# Allegro board pc049a_lemo_db_12.brd
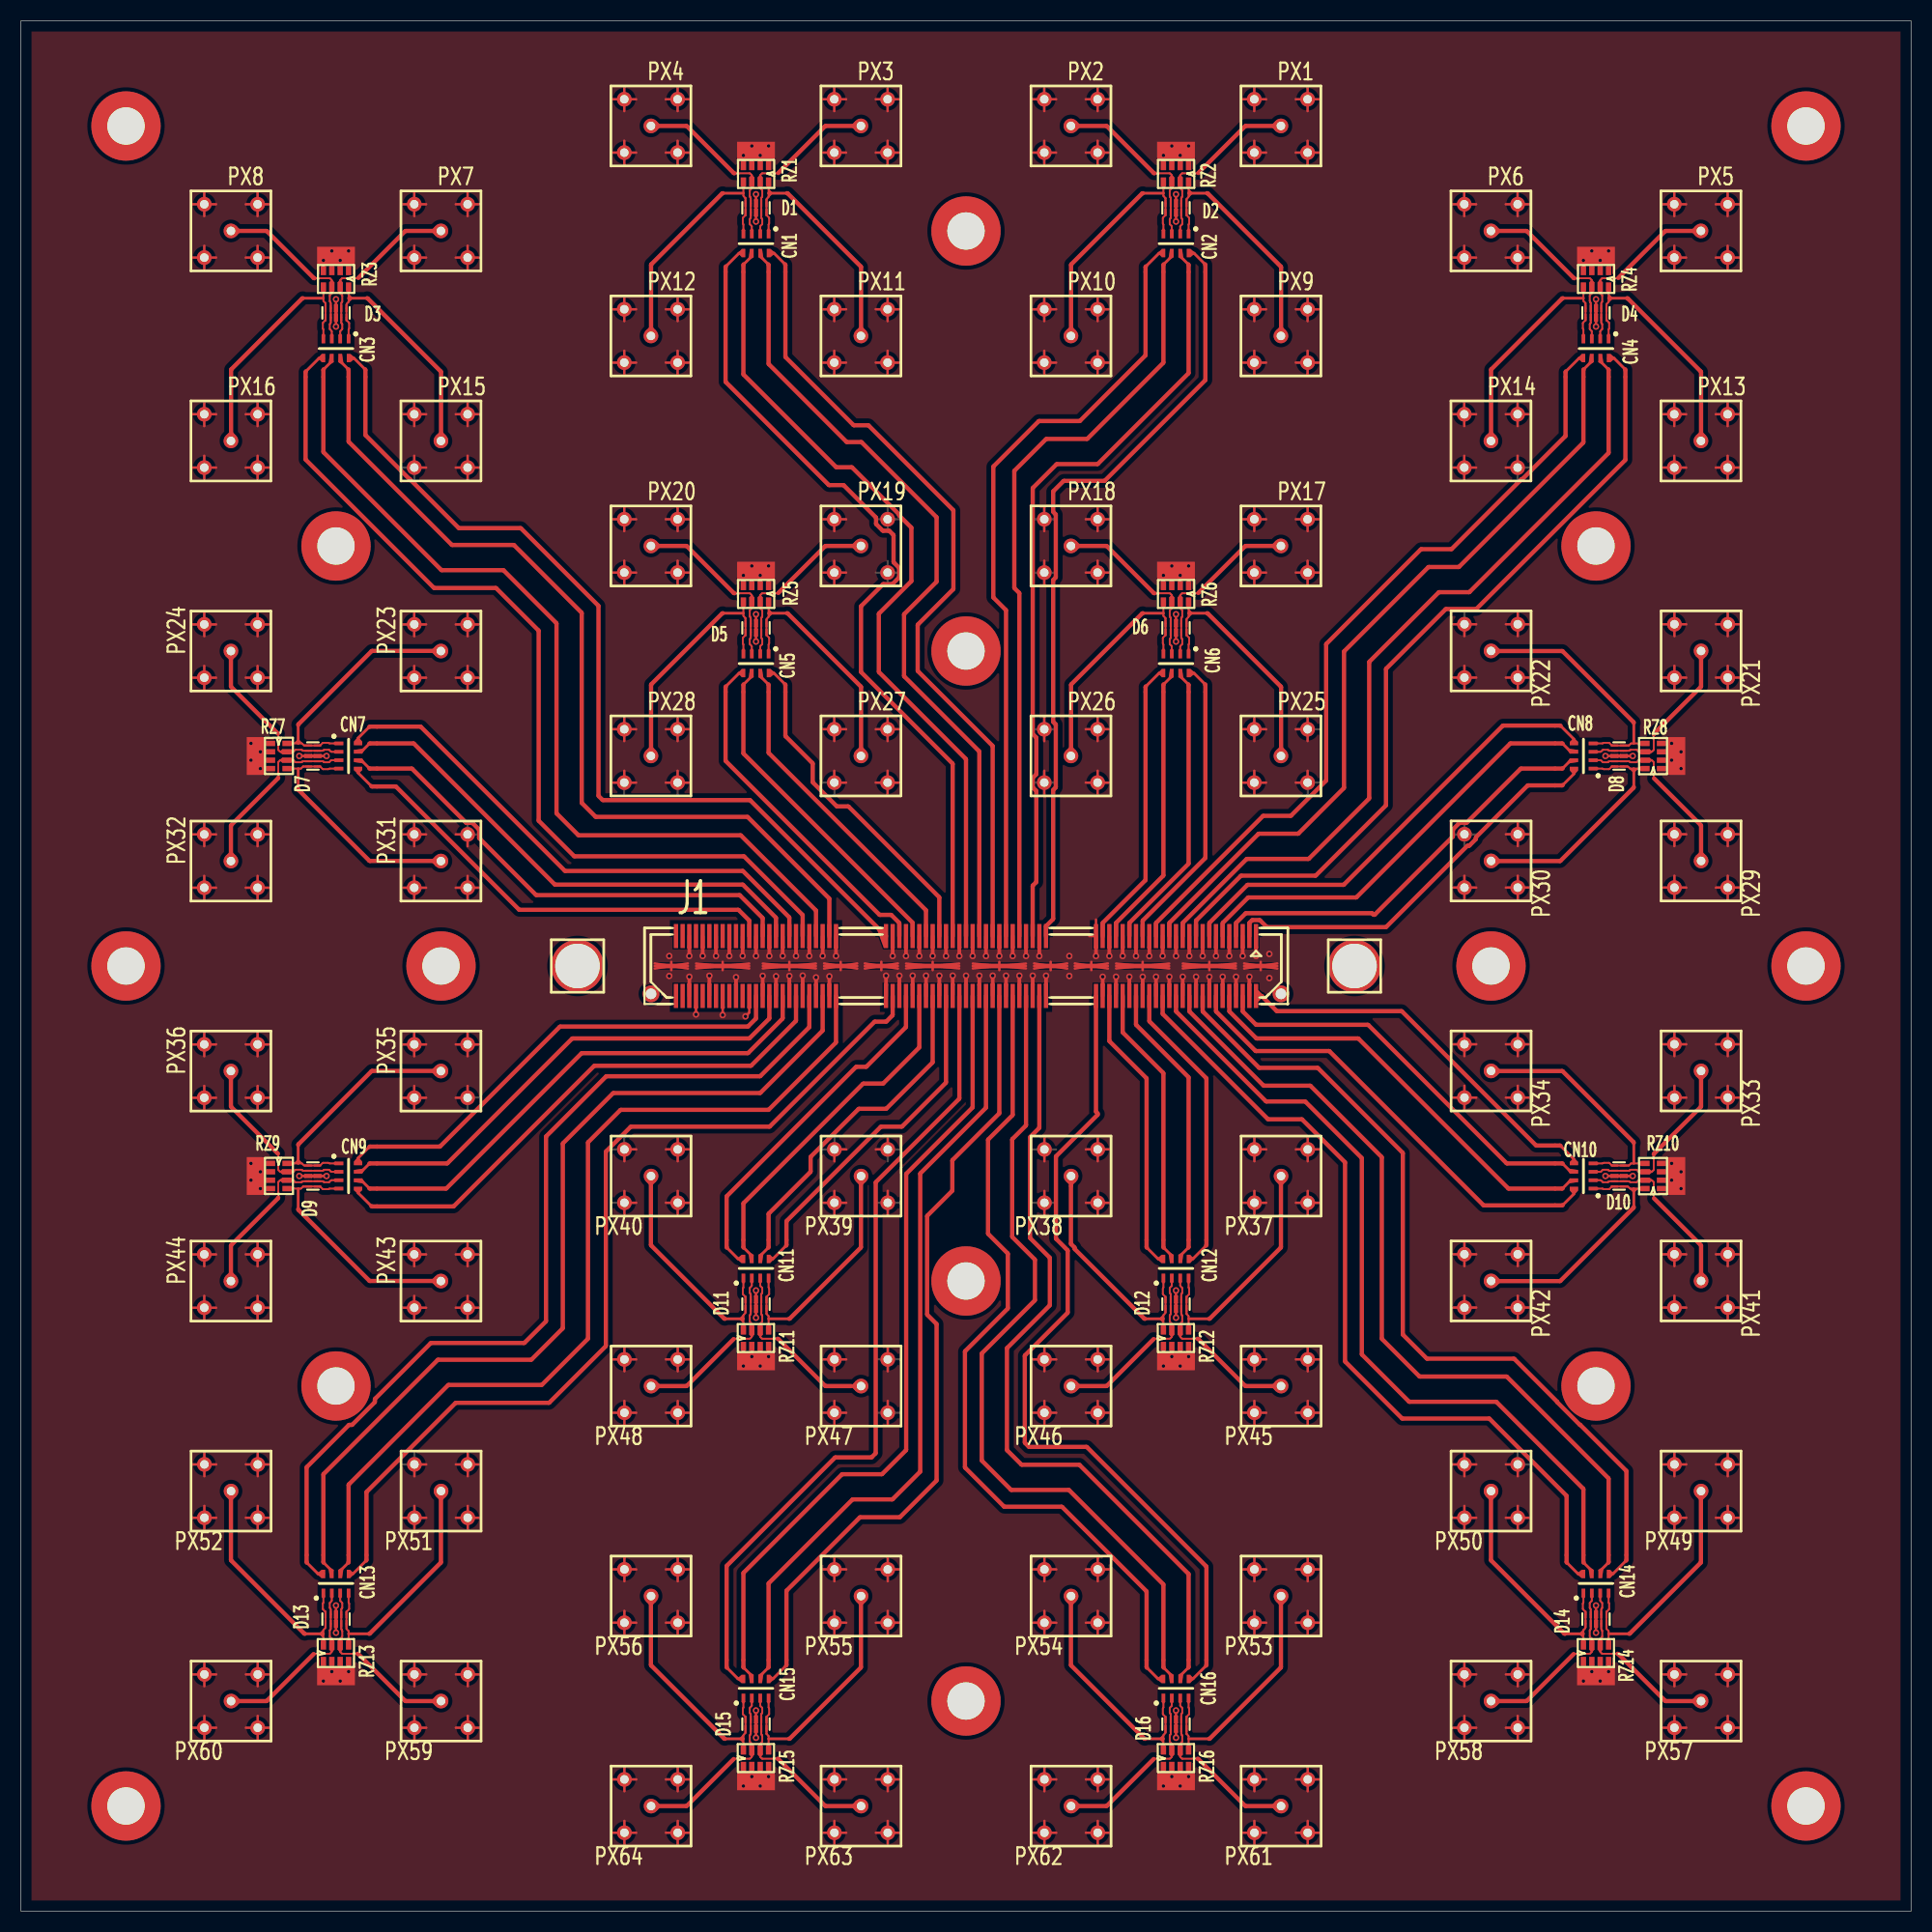
[diagram p0: board, top side]
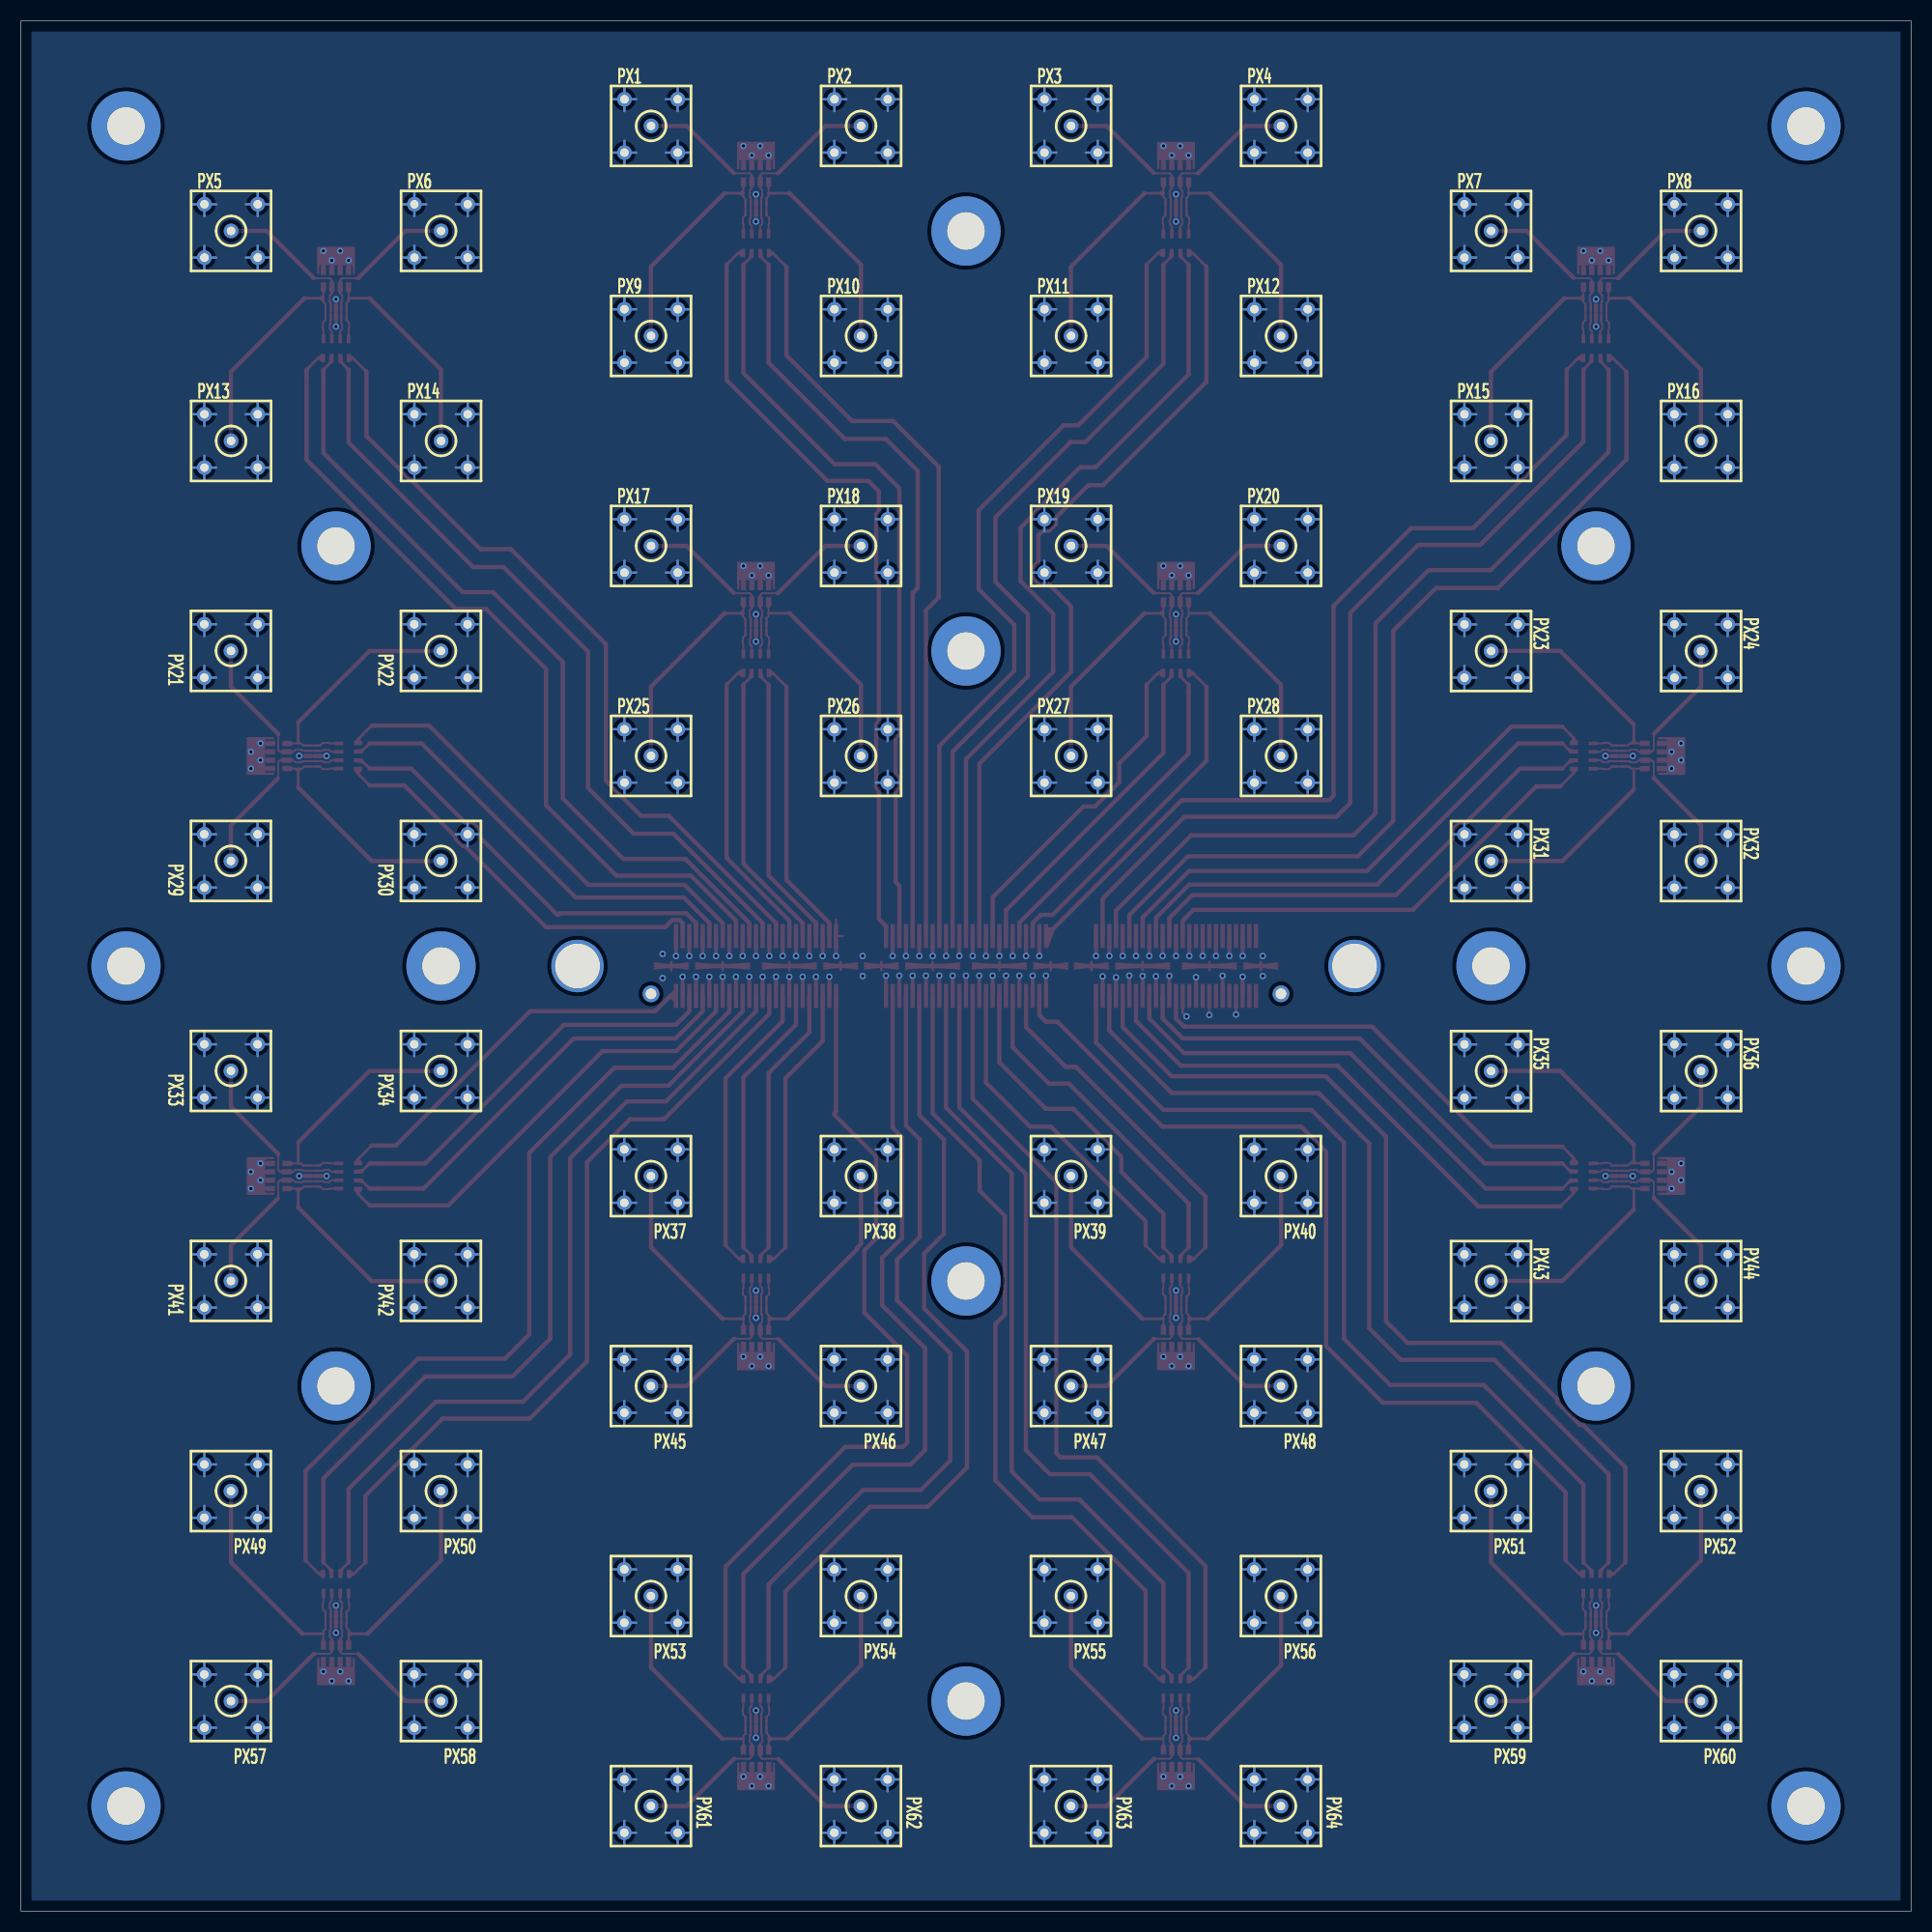
[diagram p1: board, bottom side, seen from below]

Outline 180 x 180 mm; copper layers: TOP, BOTTOM. Coordinates in mm from the lower left corner of the outline.
Outline path: 0,180 180,180 180,0 0,0 0,180

## Design rules (mm)
net group ANALOG_TO_MAROC: nets ANALOG_TO_MAROC<0> ANALOG_TO_MAROC<1> ANALOG_TO_MAROC<2> ANALOG_TO_MAROC<3> ANALOG_TO_MAROC<4> ANALOG_TO_MAROC<5> ANALOG_TO_MAROC<6> ANALOG_TO_MAROC<7> ANALOG_TO_MAROC<8> ANALOG_TO_MAROC<9> ANALOG_TO_MAROC<10> ANALOG_TO_MAROC<11> ANALOG_TO_MAROC<12> ANALOG_TO_MAROC<13> ANALOG_TO_MAROC<14> ANALOG_TO_MAROC<15> ANALOG_TO_MAROC<16> ANALOG_TO_MAROC<17> ANALOG_TO_MAROC<18> ANALOG_TO_MAROC<19> ANALOG_TO_MAROC<20> ANALOG_TO_MAROC<21> ANALOG_TO_MAROC<22> ANALOG_TO_MAROC<23> ANALOG_TO_MAROC<24> ANALOG_TO_MAROC<25> ANALOG_TO_MAROC<26> ANALOG_TO_MAROC<27> ANALOG_TO_MAROC<28> ANALOG_TO_MAROC<29> ANALOG_TO_MAROC<30> ANALOG_TO_MAROC<31> ANALOG_TO_MAROC<32> ANALOG_TO_MAROC<33> ANALOG_TO_MAROC<34> ANALOG_TO_MAROC<35> ANALOG_TO_MAROC<36> ANALOG_TO_MAROC<37> ANALOG_TO_MAROC<38> ANALOG_TO_MAROC<39> ANALOG_TO_MAROC<40> ANALOG_TO_MAROC<41> ANALOG_TO_MAROC<42> ANALOG_TO_MAROC<43> ANALOG_TO_MAROC<44> ANALOG_TO_MAROC<45> ANALOG_TO_MAROC<46> ANALOG_TO_MAROC<47> ANALOG_TO_MAROC<48> ANALOG_TO_MAROC<49> ANALOG_TO_MAROC<50> ANALOG_TO_MAROC<51> ANALOG_TO_MAROC<52> ANALOG_TO_MAROC<53> ANALOG_TO_MAROC<54> ANALOG_TO_MAROC<55> ANALOG_TO_MAROC<56> ANALOG_TO_MAROC<57> ANALOG_TO_MAROC<58> ANALOG_TO_MAROC<59> ANALOG_TO_MAROC<60> ANALOG_TO_MAROC<61> ANALOG_TO_MAROC<62> ANALOG_TO_MAROC<63>

## Placement (name value [footprint] x y rotation side)
CN1  100nF/16V  [CAPCAF80P160X320X110-8N]  70 158.8 270 top
CN2  100nF/16V  [CAPCAF80P160X320X110-8N]  110 158.8 270 top
CN3  100nF/16V  [CAPCAF80P160X320X110-8N]  30 148.8 270 top
CN4  100nF/16V  [CAPCAF80P160X320X110-8N]  150 148.8 270 top
CN5  100nF/16V  [CAPCAF80P160X320X110-8N]  70 118.8 270 top
CN6  100nF/16V  [CAPCAF80P160X320X110-8N]  110 118.8 270 top
CN7  100nF/16V  [CAPCAF80P160X320X110-8N]  31.2 110 0 top
CN8  100nF/16V  [CAPCAF80P160X320X110-8N]  148.8 110 180 top
CN9  100nF/16V  [CAPCAF80P160X320X110-8N]  31.2 70 0 top
CN10  100nF/16V  [CAPCAF80P160X320X110-8N]  148.8 70 180 top
CN11  100nF/16V  [CAPCAF80P160X320X110-8N]  70 61.2 90 top
CN12  100nF/16V  [CAPCAF80P160X320X110-8N]  110 61.2 90 top
CN13  100nF/16V  [CAPCAF80P160X320X110-8N]  30 31.2 90 top
CN14  100nF/16V  [CAPCAF80P160X320X110-8N]  150 31.2 90 top
CN15  100nF/16V  [CAPCAF80P160X320X110-8N]  70 21.2 90 top
CN16  100nF/16V  [CAPCAF80P160X320X110-8N]  110 21.2 90 top
D1  -  [DIO_LITTELFUSE_SP3010]  70 162.2 0 top
D2  -  [DIO_LITTELFUSE_SP3010]  110 162.2 0 top
D3  -  [DIO_LITTELFUSE_SP3010]  30 152.2 0 top
D4  -  [DIO_LITTELFUSE_SP3010]  150 152.2 0 top
D5  -  [DIO_LITTELFUSE_SP3010]  70 122.2 0 top
D6  -  [DIO_LITTELFUSE_SP3010]  110 122.2 0 top
D7  -  [DIO_LITTELFUSE_SP3010]  27.8 110 90 top
D8  -  [DIO_LITTELFUSE_SP3010]  152.2 110 270 top
D9  -  [DIO_LITTELFUSE_SP3010]  27.8 70 90 top
D10  -  [DIO_LITTELFUSE_SP3010]  152.2 70 270 top
D11  -  [DIO_LITTELFUSE_SP3010]  70 57.8 180 top
D12  -  [DIO_LITTELFUSE_SP3010]  110 57.8 180 top
D13  -  [DIO_LITTELFUSE_SP3010]  30 27.8 180 top
D14  -  [DIO_LITTELFUSE_SP3010]  150 27.8 180 top
D15  -  [DIO_LITTELFUSE_SP3010]  70 17.8 180 top
D16  -  [DIO_LITTELFUSE_SP3010]  110 17.8 180 top
J1  -  [CON150_QSSDA]  117.62 92.85 270 top
NOREF  -  [unnamed]  170 10 0 top
NOREF#2  -  [#2]  0 0 90 top
NOREF#3  -  [unnamed#3]  53 90 0 top
NOREF#4  -  [unnamed]  90 160 0 top
NOREF#5  -  [unnamed]  140 90 0 top
NOREF#6  -  [unnamed#3]  127 90 0 top
NOREF#7  -  [unnamed]  30 50 0 top
NOREF#8  -  [unnamed]  90 60 0 top
NOREF#9  -  [unnamed]  150 50 0 top
NOREF#10  -  [unnamed]  40 90 0 top
NOREF#11  -  [unnamed]  90 120 0 top
NOREF#12  -  [unnamed]  10 170 0 top
NOREF#13  -  [unnamed]  90 20 0 top
NOREF#14  -  [unnamed]  10 10 0 top
NOREF#15  -  [#2]  -130 -130 0 top
NOREF#16  -  [#2]  0 180 0 top
NOREF#17  -  [unnamed]  30 130 0 top
NOREF#18  -  [unnamed]  150 130 0 top
NOREF#19  -  [unnamed]  170 170 0 top
NOREF#20  -  [unnamed]  10 90 0 top
NOREF#21  -  [unnamed]  170 90 0 top
PX1  -  [PLEMOD80]  120 170 180 bottom
PX2  -  [PLEMOD80]  100 170 180 bottom
PX3  -  [PLEMOD80]  80 170 180 bottom
PX4  -  [PLEMOD80]  60 170 180 bottom
PX5  -  [PLEMOD80]  160 160 180 bottom
PX6  -  [PLEMOD80]  140 160 180 bottom
PX7  -  [PLEMOD80]  40 160 180 bottom
PX8  -  [PLEMOD80]  20 160 180 bottom
PX9  -  [PLEMOD80]  120 150 180 bottom
PX10  -  [PLEMOD80]  100 150 180 bottom
PX11  -  [PLEMOD80]  80 150 180 bottom
PX12  -  [PLEMOD80]  60 150 180 bottom
PX13  -  [PLEMOD80]  160 140 180 bottom
PX14  -  [PLEMOD80]  140 140 180 bottom
PX15  -  [PLEMOD80]  40 140 180 bottom
PX16  -  [PLEMOD80]  20 140 180 bottom
PX17  -  [PLEMOD80]  120 130 180 bottom
PX18  -  [PLEMOD80]  100 130 180 bottom
PX19  -  [PLEMOD80]  80 130 180 bottom
PX20  -  [PLEMOD80]  60 130 180 bottom
PX21  -  [PLEMOD80]  160 120 90 bottom
PX22  -  [PLEMOD80]  140 120 90 bottom
PX23  -  [PLEMOD80]  40 120 270 bottom
PX24  -  [PLEMOD80]  20 120 270 bottom
PX25  -  [PLEMOD80]  120 110 180 bottom
PX26  -  [PLEMOD80]  100 110 180 bottom
PX27  -  [PLEMOD80]  80 110 180 bottom
PX28  -  [PLEMOD80]  60 110 180 bottom
PX29  -  [PLEMOD80]  160 100 90 bottom
PX30  -  [PLEMOD80]  140 100 90 bottom
PX31  -  [PLEMOD80]  40 100 270 bottom
PX32  -  [PLEMOD80]  20 100 270 bottom
PX33  -  [PLEMOD80]  160 80 90 bottom
PX34  -  [PLEMOD80]  140 80 90 bottom
PX35  -  [PLEMOD80]  40 80 270 bottom
PX36  -  [PLEMOD80]  20 80 270 bottom
PX37  -  [PLEMOD80]  120 70 0 bottom
PX38  -  [PLEMOD80]  100 70 0 bottom
PX39  -  [PLEMOD80]  80 70 0 bottom
PX40  -  [PLEMOD80]  60 70 0 bottom
PX41  -  [PLEMOD80]  160 60 90 bottom
PX42  -  [PLEMOD80]  140 60 90 bottom
PX43  -  [PLEMOD80]  40 60 270 bottom
PX44  -  [PLEMOD80]  20 60 270 bottom
PX45  -  [PLEMOD80]  120 50 0 bottom
PX46  -  [PLEMOD80]  100 50 0 bottom
PX47  -  [PLEMOD80]  80 50 0 bottom
PX48  -  [PLEMOD80]  60 50 0 bottom
PX49  -  [PLEMOD80]  160 40 0 bottom
PX50  -  [PLEMOD80]  140 40 0 bottom
PX51  -  [PLEMOD80]  40 40 0 bottom
PX52  -  [PLEMOD80]  20 40 0 bottom
PX53  -  [PLEMOD80]  120 30 0 bottom
PX54  -  [PLEMOD80]  100 30 0 bottom
PX55  -  [PLEMOD80]  80 30 0 bottom
PX56  -  [PLEMOD80]  60 30 0 bottom
PX57  -  [PLEMOD80]  160 20 0 bottom
PX58  -  [PLEMOD80]  140 20 0 bottom
PX59  -  [PLEMOD80]  40 20 0 bottom
PX60  -  [PLEMOD80]  20 20 0 bottom
PX61  -  [PLEMOD80]  120 10 0 bottom
PX62  -  [PLEMOD80]  100 10 0 bottom
PX63  -  [PLEMOD80]  80 10 0 bottom
PX64  -  [PLEMOD80]  60 10 0 bottom
RZ1  180  [ARC241_SO8]  71.2 166.2 180 top
RZ2  180  [ARC241_SO8]  111.2 166.2 180 top
RZ3  180  [ARC241_SO8]  31.2 156.2 180 top
RZ4  180  [ARC241_SO8]  151.2 156.2 180 top
RZ5  180  [ARC241_SO8]  71.2 126.2 180 top
RZ6  180  [ARC241_SO8]  111.2 126.2 180 top
RZ7  180  [ARC241_SO8]  23.8 111.2 270 top
RZ8  180  [ARC241_SO8]  156.2 108.8 90 top
RZ9  180  [ARC241_SO8]  23.8 71.2 270 top
RZ10  180  [ARC241_SO8]  156.2 68.8 90 top
RZ11  180  [ARC241_SO8]  68.8 53.8 0 top
RZ12  180  [ARC241_SO8]  108.8 53.8 0 top
RZ13  180  [ARC241_SO8]  28.8 23.8 0 top
RZ14  180  [ARC241_SO8]  148.8 23.8 0 top
RZ15  180  [ARC241_SO8]  68.8 13.8 0 top
RZ16  180  [ARC241_SO8]  108.8 13.8 0 top

## Library data of the parts
CN1-CN16 = CAPN4I: part number: CAPN4I-100NF,16V,X7R,CKCA43
D1-D16 = TVS_DIODE_ARRAY_SP3010: part number: TVS_DIODE_ARRAY_SP3010_UDFN-SP3010-04UTG
J1 = CON150P: part number: CON150P-QSS75_01FDA
PX1-PX64 = COAX: part number: COAX-PLEMO00D
RZ1-RZ16 = R4ISMD: part number: R4ISMD_1206-180

## Footprints (pads in the part's own frame, mm; a bottom-side part is the same pattern mirrored in y, then rotated)
ARC241_SO8
  rect 0.508x0.813 smd: 1(0,0) 2(0.8,0) 3(1.6,0) 4(2.4,0) 5(2.4,1.505) 6(1.6,1.505) 7(0.8,1.505) 8(0,1.505)
CAPCAF80P160X320X110-8N
  rect 0.8x0.35 smd: 1(-0.9,1.2) 2(0.9,1.2) 3(-0.9,0.4) 4(0.9,0.4) 5(-0.9,-0.4) 6(0.9,-0.4) 7(-0.9,-1.2) 8(0.9,-1.2)
CON150_QSSDA
  round 1.6 hole 1.016: (5.5,2.38) (5.5,-57.62)
  rect 2.286x0.406 smd: 1(0,0) 2(5.7,0) 3(0,-0.635) 4(5.7,-0.635) 5(0,-1.27) 6(5.7,-1.27) 7(0,-1.905) 8(5.7,-1.905) 9(0,-2.54) 10(5.7,-2.54) 11(0,-3.175) 12(5.7,-3.175) 13(0,-3.81) 14(5.7,-3.81) 15(0,-4.445) 16(5.7,-4.445) 17(0,-5.08) 18(5.7,-5.08) 19(0,-5.715) 20(5.7,-5.715) 21(0,-6.35) 22(5.7,-6.35) 23(0,-6.985) 24(5.7,-6.985) 25(0,-7.62) 26(5.7,-7.62) 27(0,-8.255) 28(5.7,-8.255) 29(0,-8.89) 30(5.7,-8.89) 31(0,-9.525) 32(5.7,-9.525) 33(0,-10.16) 34(5.7,-10.16) 35(0,-10.795) 36(5.7,-10.795) 37(0,-11.43) 38(5.7,-11.43) 39(0,-12.065) 40(5.7,-12.065) 41(0,-12.7) 42(5.7,-12.7) 43(0,-13.335) 44(5.7,-13.335) 45(0,-13.97) 46(5.7,-13.97) 47(0,-14.605) 48(5.7,-14.605) 49(0,-15.24) 50(5.7,-15.24) 51(0,-20) 52(5.7,-20) 53(0,-20.635) 54(5.7,-20.635) 55(0,-21.27) 56(5.7,-21.27) 57(0,-21.905) 58(5.7,-21.905) 59(0,-22.54) 60(5.7,-22.54) 61(0,-23.175) 62(5.7,-23.175) 63(0,-23.81) 64(5.7,-23.81) 65(0,-24.445) 66(5.7,-24.445) 67(0,-25.08) 68(5.7,-25.08) 69(0,-25.715) 70(5.7,-25.715) 71(0,-26.35) 72(5.7,-26.35) 73(0,-26.985) 74(5.7,-26.985) 75(0,-27.62) 76(5.7,-27.62) 77(0,-28.255) 78(5.7,-28.255) 79(0,-28.89) 80(5.7,-28.89) 81(0,-29.525) 82(5.7,-29.525) 83(0,-30.16) 84(5.7,-30.16) 85(0,-30.795) 86(5.7,-30.795) 87(0,-31.43) 88(5.7,-31.43) 89(0,-32.065) 90(5.7,-32.065) 91(0,-32.7) 92(5.7,-32.7) 93(0,-33.335) 94(5.7,-33.335) 95(0,-33.97) 96(5.7,-33.97) 97(0,-34.605) 98(5.7,-34.605) 99(0,-35.24) 100(5.7,-35.24) 101(0,-40) 102(5.7,-40) 103(0,-40.635) 104(5.7,-40.635) 105(0,-41.27) 106(5.7,-41.27) 107(0,-41.905) 108(5.7,-41.905) 109(0,-42.54) 110(5.7,-42.54) 111(0,-43.175) 112(5.7,-43.175) 113(0,-43.81) 114(5.7,-43.81) 115(0,-44.445) 116(5.7,-44.445) 117(0,-45.08) 118(5.7,-45.08) 119(0,-45.715) 120(5.7,-45.715) 121(0,-46.35) 122(5.7,-46.35) 123(0,-46.985) 124(5.7,-46.985) 125(0,-47.62) 126(5.7,-47.62) 127(0,-48.255) 128(5.7,-48.255) 129(0,-48.89) 130(5.7,-48.89) 131(0,-49.525) 132(5.7,-49.525) 133(0,-50.16) 134(5.7,-50.16) 135(0,-50.795) 136(5.7,-50.795) 137(0,-51.43) 138(5.7,-51.43) 139(0,-52.065) 140(5.7,-52.065) 141(0,-52.7) 142(5.7,-52.7) 143(0,-53.335) 144(5.7,-53.335) 145(0,-53.97) 146(5.7,-53.97) 147(0,-54.605) 148(5.7,-54.605) 149(0,-55.24) 150(5.7,-55.24)
  rect 0.432x2.794 smd: 151(2.85,0.445) 154(2.85,-15.685) 155(2.85,-19.555) 158(2.85,-35.685) 159(2.85,-39.555) 162(2.85,-55.685)
  rect 0.432x4.699 smd: 152(2.85,-4.445) 153(2.85,-10.795) 156(2.85,-24.445) 157(2.85,-30.795) 160(2.85,-44.445) 161(2.85,-50.795)
DIO_LITTELFUSE_SP3010
  rect 0.2x0.7 smd: 1(1,0.437) 2(0.5,0.437) 4(-0.5,0.437) 5(-1,0.437) 6(-1,-0.438) 7(-0.5,-0.438) 9(0.5,-0.438) 10(1,-0.438)
  rect 0.4x0.7 smd: 3(0,0.437) 8(0,-0.438)
PLEMOD80
  round 1.397 hole 0.813: 1(0.006,0.007) 2(-2.534,-2.533) 3(2.546,-2.533) 4(2.546,2.547) 5(-2.534,2.547)
unnamed
  round 6.604 hole 3.556: 1(0,0)
unnamed#3
  round 5 hole 4.24 unplated: (0,0)

## Nets
AVDD: J1.147(A<146>) J1.148(A<147>) J1.149(A<148>) J1.150(A<149>)
GND_SIGNAL: D1.3(GND1) D1.8(GND2) D2.3(GND1) D2.8(GND2) D3.3(GND1) D3.8(GND2) D4.3(GND1) D4.8(GND2) D5.3(GND1) D5.8(GND2) D6.3(GND1) D6.8(GND2) D7.3(GND1) D7.8(GND2) D8.3(GND1) D8.8(GND2) D9.3(GND1) D9.8(GND2) D10.3(GND1) D10.8(GND2) D11.3(GND1) D11.8(GND2) D12.3(GND1) D12.8(GND2) D13.3(GND1) D13.8(GND2) D14.3(GND1) D14.8(GND2) D15.3(GND1) D15.8(GND2) D16.3(GND1) D16.8(GND2) J1.1(A<0>) J1.4(A<3>) J1.5(A<4>) J1.8(A<7>) J1.9(A<8>) J1.12(A<11>) J1.13(A<12>) J1.16(A<15>) J1.17(A<16>) J1.20(A<19>) J1.21(A<20>) J1.24(A<23>) J1.25(A<24>) J1.28(A<27>) J1.29(A<28>) J1.32(A<31>) J1.33(A<32>) J1.36(A<35>) J1.37(A<36>) J1.40(A<39>) J1.41(A<40>) J1.44(A<43>) J1.45(A<44>) J1.48(A<47>) J1.49(A<48>) J1.52(A<51>) J1.53(A<52>) J1.56(A<55>) J1.57(A<56>) J1.60(A<59>) J1.61(A<60>) J1.64(A<63>) J1.65(A<64>) J1.68(A<67>) J1.69(A<68>) J1.72(A<71>) J1.73(A<72>) J1.76(A<75>) J1.77(A<76>) J1.80(A<79>) J1.81(A<80>) J1.84(A<83>) J1.85(A<84>) J1.88(A<87>) J1.89(A<88>) J1.92(A<91>) J1.93(A<92>) J1.96(A<95>) J1.97(A<96>) J1.100(A<99>) J1.101(A<100>) J1.104(A<103>) J1.105(A<104>) J1.108(A<107>) J1.109(A<108>) J1.112(A<111>) J1.113(A<112>) J1.116(A<115>) J1.117(A<116>) J1.120(A<119>) J1.121(A<120>) J1.124(A<123>) J1.125(A<124>) J1.128(A<127>) J1.129(A<128>) J1.132(A<131>) J1.133(A<132>) J1.136(A<135>) J1.137(A<136>) J1.140(A<139>) J1.141(A<140>) J1.144(A<143>) J1.145(A<144>) J1.146(A<145>) J1.151 J1.152 J1.153 J1.154 J1.155 J1.156 J1.157 J1.158 J1.159 J1.160 J1.161 J1.162 PX1.2(B<0>) PX1.3(B<1>) PX1.4(B<2>) PX1.5(B<3>) PX2.2(B<0>) PX2.3(B<1>) PX2.4(B<2>) PX2.5(B<3>) PX3.2(B<0>) PX3.3(B<1>) PX3.4(B<2>) PX3.5(B<3>) PX4.2(B<0>) PX4.3(B<1>) PX4.4(B<2>) PX4.5(B<3>) PX5.2(B<0>) PX5.3(B<1>) PX5.4(B<2>) PX5.5(B<3>) PX6.2(B<0>) PX6.3(B<1>) PX6.4(B<2>) PX6.5(B<3>) PX7.2(B<0>) PX7.3(B<1>) PX7.4(B<2>) PX7.5(B<3>) PX8.2(B<0>) PX8.3(B<1>) PX8.4(B<2>) PX8.5(B<3>) PX9.2(B<0>) PX9.3(B<1>) PX9.4(B<2>) PX9.5(B<3>) PX10.2(B<0>) PX10.3(B<1>) PX10.4(B<2>) PX10.5(B<3>) PX11.2(B<0>) PX11.3(B<1>) PX11.4(B<2>) PX11.5(B<3>) PX12.2(B<0>) PX12.3(B<1>) PX12.4(B<2>) PX12.5(B<3>) PX13.2(B<0>) PX13.3(B<1>) PX13.4(B<2>) PX13.5(B<3>) PX14.2(B<0>) PX14.3(B<1>) PX14.4(B<2>) PX14.5(B<3>) PX15.2(B<0>) PX15.3(B<1>) PX15.4(B<2>) PX15.5(B<3>) PX16.2(B<0>) PX16.3(B<1>) PX16.4(B<2>) PX16.5(B<3>) PX17.2(B<0>) PX17.3(B<1>) PX17.4(B<2>) PX17.5(B<3>) PX18.2(B<0>) PX18.3(B<1>) PX18.4(B<2>) PX18.5(B<3>) PX19.2(B<0>) PX19.3(B<1>) PX19.4(B<2>) PX19.5(B<3>) PX20.2(B<0>) PX20.3(B<1>) PX20.4(B<2>) PX20.5(B<3>) PX21.2(B<0>) PX21.3(B<1>) PX21.4(B<2>) PX21.5(B<3>) PX22.2(B<0>) PX22.3(B<1>) PX22.4(B<2>) PX22.5(B<3>) PX23.2(B<0>) PX23.3(B<1>) PX23.4(B<2>) PX23.5(B<3>) PX24.2(B<0>) PX24.3(B<1>) PX24.4(B<2>) PX24.5(B<3>) PX25.2(B<0>) PX25.3(B<1>) PX25.4(B<2>) PX25.5(B<3>) PX26.2(B<0>) PX26.3(B<1>) PX26.4(B<2>) PX26.5(B<3>) PX27.2(B<0>) PX27.3(B<1>) PX27.4(B<2>) PX27.5(B<3>) PX28.2(B<0>) PX28.3(B<1>) PX28.4(B<2>) PX28.5(B<3>) PX29.2(B<0>) PX29.3(B<1>) PX29.4(B<2>) PX29.5(B<3>) PX30.2(B<0>) PX30.3(B<1>) PX30.4(B<2>) PX30.5(B<3>) PX31.2(B<0>) PX31.3(B<1>) PX31.4(B<2>) PX31.5(B<3>) PX32.2(B<0>) PX32.3(B<1>) PX32.4(B<2>) PX32.5(B<3>) PX33.2(B<0>) PX33.3(B<1>) PX33.4(B<2>) PX33.5(B<3>) PX34.2(B<0>) PX34.3(B<1>) PX34.4(B<2>) PX34.5(B<3>) PX35.2(B<0>) PX35.3(B<1>) PX35.4(B<2>) PX35.5(B<3>) PX36.2(B<0>) PX36.3(B<1>) PX36.4(B<2>) PX36.5(B<3>) PX37.2(B<0>) PX37.3(B<1>) PX37.4(B<2>) PX37.5(B<3>) PX38.2(B<0>) PX38.3(B<1>) PX38.4(B<2>) PX38.5(B<3>) PX39.2(B<0>) PX39.3(B<1>) PX39.4(B<2>) PX39.5(B<3>) PX40.2(B<0>) PX40.3(B<1>) PX40.4(B<2>) PX40.5(B<3>) PX41.2(B<0>) PX41.3(B<1>) PX41.4(B<2>) PX41.5(B<3>) PX42.2(B<0>) PX42.3(B<1>) PX42.4(B<2>) PX42.5(B<3>) PX43.2(B<0>) PX43.3(B<1>) PX43.4(B<2>) PX43.5(B<3>) PX44.2(B<0>) PX44.3(B<1>) PX44.4(B<2>) PX44.5(B<3>) PX45.2(B<0>) PX45.3(B<1>) PX45.4(B<2>) PX45.5(B<3>) PX46.2(B<0>) PX46.3(B<1>) PX46.4(B<2>) PX46.5(B<3>) PX47.2(B<0>) PX47.3(B<1>) PX47.4(B<2>) PX47.5(B<3>) PX48.2(B<0>) PX48.3(B<1>) PX48.4(B<2>) PX48.5(B<3>) PX49.2(B<0>) PX49.3(B<1>) PX49.4(B<2>) PX49.5(B<3>) PX50.2(B<0>) PX50.3(B<1>) PX50.4(B<2>) PX50.5(B<3>) PX51.2(B<0>) PX51.3(B<1>) PX51.4(B<2>) PX51.5(B<3>) PX52.2(B<0>) PX52.3(B<1>) PX52.4(B<2>) PX52.5(B<3>) PX53.2(B<0>) PX53.3(B<1>) PX53.4(B<2>) PX53.5(B<3>) PX54.2(B<0>) PX54.3(B<1>) PX54.4(B<2>) PX54.5(B<3>) PX55.2(B<0>) PX55.3(B<1>) PX55.4(B<2>) PX55.5(B<3>) PX56.2(B<0>) PX56.3(B<1>) PX56.4(B<2>) PX56.5(B<3>) PX57.2(B<0>) PX57.3(B<1>) PX57.4(B<2>) PX57.5(B<3>) PX58.2(B<0>) PX58.3(B<1>) PX58.4(B<2>) PX58.5(B<3>) PX59.2(B<0>) PX59.3(B<1>) PX59.4(B<2>) PX59.5(B<3>) PX60.2(B<0>) PX60.3(B<1>) PX60.4(B<2>) PX60.5(B<3>) PX61.2(B<0>) PX61.3(B<1>) PX61.4(B<2>) PX61.5(B<3>) PX62.2(B<0>) PX62.3(B<1>) PX62.4(B<2>) PX62.5(B<3>) PX63.2(B<0>) PX63.3(B<1>) PX63.4(B<2>) PX63.5(B<3>) PX64.2(B<0>) PX64.3(B<1>) PX64.4(B<2>) PX64.5(B<3>) RZ1.1(A<0>) RZ1.2(A<0>) RZ1.3(A<0>) RZ1.4(A<0>) RZ2.1(A<0>) RZ2.2(A<0>) RZ2.3(A<0>) RZ2.4(A<0>) RZ3.1(A<0>) RZ3.2(A<0>) RZ3.3(A<0>) RZ3.4(A<0>) RZ4.1(A<0>) RZ4.2(A<0>) RZ4.3(A<0>) RZ4.4(A<0>) RZ5.1(A<0>) RZ5.2(A<0>) RZ5.3(A<0>) RZ5.4(A<0>) RZ6.1(A<0>) RZ6.2(A<0>) RZ6.3(A<0>) RZ6.4(A<0>) RZ7.1(A<0>) RZ7.2(A<0>) RZ7.3(A<0>) RZ7.4(A<0>) RZ8.1(A<0>) RZ8.2(A<0>) RZ8.3(A<0>) RZ8.4(A<0>) RZ9.1(A<0>) RZ9.2(A<0>) RZ9.3(A<0>) RZ9.4(A<0>) RZ10.1(A<0>) RZ10.2(A<0>) RZ10.3(A<0>) RZ10.4(A<0>) RZ11.1(A<0>) RZ11.2(A<0>) RZ11.3(A<0>) RZ11.4(A<0>) RZ12.1(A<0>) RZ12.2(A<0>) RZ12.3(A<0>) RZ12.4(A<0>) RZ13.1(A<0>) RZ13.2(A<0>) RZ13.3(A<0>) RZ13.4(A<0>) RZ14.1(A<0>) RZ14.2(A<0>) RZ14.3(A<0>) RZ14.4(A<0>) RZ15.1(A<0>) RZ15.2(A<0>) RZ15.3(A<0>) RZ15.4(A<0>) RZ16.1(A<0>) RZ16.2(A<0>) RZ16.3(A<0>) RZ16.4(A<0>)
ANALOG_TO_MAROC<0>: CN10.8(B<0>) J1.2(A<1>)
ANALOG_TO_MAROC<1>: CN8.2(B<0>) J1.3(A<2>)
ANALOG_TO_MAROC<2>: CN10.6(B<0>) J1.6(A<5>)
ANALOG_TO_MAROC<3>: CN8.4(B<0>) J1.7(A<6>)
ANALOG_TO_MAROC<4>: CN10.4(B<0>) J1.10(A<9>)
ANALOG_TO_MAROC<5>: CN8.6(B<0>) J1.11(A<10>)
ANALOG_TO_MAROC<6>: CN10.2(B<0>) J1.14(A<13>)
ANALOG_TO_MAROC<7>: CN8.8(B<0>) J1.15(A<14>)
ANALOG_TO_MAROC<8>: CN14.8(B<0>) J1.18(A<17>)
ANALOG_TO_MAROC<9>: CN4.2(B<0>) J1.19(A<18>)
ANALOG_TO_MAROC<10>: CN14.6(B<0>) J1.22(A<21>)
ANALOG_TO_MAROC<11>: CN4.4(B<0>) J1.23(A<22>)
ANALOG_TO_MAROC<12>: CN14.4(B<0>) J1.26(A<25>)
ANALOG_TO_MAROC<13>: CN4.6(B<0>) J1.27(A<26>)
ANALOG_TO_MAROC<14>: CN14.2(B<0>) J1.30(A<29>)
ANALOG_TO_MAROC<15>: CN4.8(B<0>) J1.31(A<30>)
ANALOG_TO_MAROC<16>: CN12.8(B<0>) J1.34(A<33>)
ANALOG_TO_MAROC<17>: CN6.2(B<0>) J1.35(A<34>)
ANALOG_TO_MAROC<18>: CN12.6(B<0>) J1.38(A<37>)
ANALOG_TO_MAROC<19>: CN6.4(B<0>) J1.39(A<38>)
ANALOG_TO_MAROC<20>: CN12.4(B<0>) J1.42(A<41>)
ANALOG_TO_MAROC<21>: CN6.6(B<0>) J1.43(A<42>)
ANALOG_TO_MAROC<22>: CN12.2(B<0>) J1.46(A<45>)
ANALOG_TO_MAROC<23>: CN6.8(B<0>) J1.47(A<46>)
ANALOG_TO_MAROC<24>: CN16.8(B<0>) J1.50(A<49>)
ANALOG_TO_MAROC<25>: CN2.2(B<0>) J1.51(A<50>)
ANALOG_TO_MAROC<26>: CN16.6(B<0>) J1.54(A<53>)
ANALOG_TO_MAROC<27>: CN2.4(B<0>) J1.55(A<54>)
ANALOG_TO_MAROC<28>: CN16.4(B<0>) J1.58(A<57>)
ANALOG_TO_MAROC<29>: CN2.6(B<0>) J1.59(A<58>)
ANALOG_TO_MAROC<30>: CN16.2(B<0>) J1.62(A<61>)
ANALOG_TO_MAROC<31>: CN2.8(B<0>) J1.63(A<62>)
ANALOG_TO_MAROC<32>: CN15.8(B<0>) J1.66(A<65>)
ANALOG_TO_MAROC<33>: CN1.2(B<0>) J1.67(A<66>)
ANALOG_TO_MAROC<34>: CN15.6(B<0>) J1.70(A<69>)
ANALOG_TO_MAROC<35>: CN1.4(B<0>) J1.71(A<70>)
ANALOG_TO_MAROC<36>: CN15.4(B<0>) J1.74(A<73>)
ANALOG_TO_MAROC<37>: CN1.6(B<0>) J1.75(A<74>)
ANALOG_TO_MAROC<38>: CN15.2(B<0>) J1.78(A<77>)
ANALOG_TO_MAROC<39>: CN1.8(B<0>) J1.79(A<78>)
ANALOG_TO_MAROC<40>: CN11.8(B<0>) J1.82(A<81>)
ANALOG_TO_MAROC<41>: CN5.2(B<0>) J1.83(A<82>)
ANALOG_TO_MAROC<42>: CN11.6(B<0>) J1.86(A<85>)
ANALOG_TO_MAROC<43>: CN5.4(B<0>) J1.87(A<86>)
ANALOG_TO_MAROC<44>: CN11.4(B<0>) J1.90(A<89>)
ANALOG_TO_MAROC<45>: CN5.6(B<0>) J1.91(A<90>)
ANALOG_TO_MAROC<46>: CN11.2(B<0>) J1.94(A<93>)
ANALOG_TO_MAROC<47>: CN5.8(B<0>) J1.95(A<94>)
ANALOG_TO_MAROC<48>: CN13.8(B<0>) J1.98(A<97>)
ANALOG_TO_MAROC<49>: CN3.2(B<0>) J1.99(A<98>)
ANALOG_TO_MAROC<50>: CN13.6(B<0>) J1.102(A<101>)
ANALOG_TO_MAROC<51>: CN3.4(B<0>) J1.103(A<102>)
ANALOG_TO_MAROC<52>: CN13.4(B<0>) J1.106(A<105>)
ANALOG_TO_MAROC<53>: CN3.6(B<0>) J1.107(A<106>)
ANALOG_TO_MAROC<54>: CN13.2(B<0>) J1.110(A<109>)
ANALOG_TO_MAROC<55>: CN3.8(B<0>) J1.111(A<110>)
ANALOG_TO_MAROC<56>: CN9.8(B<0>) J1.114(A<113>)
ANALOG_TO_MAROC<57>: CN7.2(B<0>) J1.115(A<114>)
ANALOG_TO_MAROC<58>: CN9.6(B<0>) J1.118(A<117>)
ANALOG_TO_MAROC<59>: CN7.4(B<0>) J1.119(A<118>)
ANALOG_TO_MAROC<60>: CN9.4(B<0>) J1.122(A<121>)
ANALOG_TO_MAROC<61>: CN7.6(B<0>) J1.123(A<122>)
ANALOG_TO_MAROC<62>: CN9.2(B<0>) J1.126(A<125>)
ANALOG_TO_MAROC<63>: CN7.8(B<0>) J1.127(A<126>)
DBOARD_MISO: J1.131(A<130>)
DBOARD_MISO*: J1.135(A<134>)
DBOARD_MOSI: J1.138(A<137>)
DBOARD_MOSI*: J1.142(A<141>)
DBOARD_SCLK: J1.130(A<129>)
DBOARD_SCLK*: J1.134(A<133>)
DBOARD_SSN: J1.139(A<138>)
DBOARD_SSN*: J1.143(A<142>)
UNNAMED_1_CAPN4I_I10_A_1: CN9.1(A<0>) D9.1(A1) D9.10(B1) PX35.1(A) RZ9.8(B<0>)
UNNAMED_1_CAPN4I_I10_A_1_1: CN9.3(A<0>) D9.2(A2) D9.9(B2) PX36.1(A) RZ9.7(B<0>)
UNNAMED_1_CAPN4I_I10_A_1_2: CN13.3(A<0>) D13.2(A2) D13.9(B2) PX60.1(A) RZ13.7(B<0>)
UNNAMED_1_CAPN4I_I10_A_1_3: CN11.3(A<0>) D11.2(A2) D11.9(B2) PX48.1(A) RZ11.7(B<0>)
UNNAMED_1_CAPN4I_I10_A_1_4: CN15.3(A<0>) D15.2(A2) D15.9(B2) PX64.1(A) RZ15.7(B<0>)
UNNAMED_1_CAPN4I_I10_A_1_5: CN16.3(A<0>) D16.2(A2) D16.9(B2) PX62.1(A) RZ16.7(B<0>)
UNNAMED_1_CAPN4I_I10_A_1_6: CN12.3(A<0>) D12.2(A2) D12.9(B2) PX46.1(A) RZ12.7(B<0>)
UNNAMED_1_CAPN4I_I10_A_1_7: CN10.3(A<0>) D10.2(A2) D10.9(B2) PX41.1(A) RZ10.7(B<0>)
UNNAMED_1_CAPN4I_I10_A_1_8: CN14.3(A<0>) D14.2(A2) D14.9(B2) PX58.1(A) RZ14.7(B<0>)
UNNAMED_1_CAPN4I_I10_A_1_9: CN8.3(A<0>) D8.2(A2) D8.9(B2) PX29.1(A) RZ8.7(B<0>)
UNNAMED_1_CAPN4I_I10_A_1_10: CN4.3(A<0>) D4.2(A2) D4.9(B2) PX5.1(A) RZ4.7(B<0>)
UNNAMED_1_CAPN4I_I10_A_1_11: CN2.3(A<0>) D2.2(A2) D2.9(B2) PX1.1(A) RZ2.7(B<0>)
UNNAMED_1_CAPN4I_I10_A_1_12: CN6.3(A<0>) D6.2(A2) D6.9(B2) PX17.1(A) RZ6.7(B<0>)
UNNAMED_1_CAPN4I_I10_A_1_13: CN1.3(A<0>) D1.2(A2) D1.9(B2) PX3.1(A) RZ1.7(B<0>)
UNNAMED_1_CAPN4I_I10_A_1_14: CN5.3(A<0>) D5.2(A2) D5.9(B2) PX19.1(A) RZ5.7(B<0>)
UNNAMED_1_CAPN4I_I10_A_1_15: CN7.3(A<0>) D7.2(A2) D7.9(B2) PX24.1(A) RZ7.7(B<0>)
UNNAMED_1_CAPN4I_I10_A_1_16: CN3.3(A<0>) D3.2(A2) D3.9(B2) PX7.1(A) RZ3.7(B<0>)
UNNAMED_1_CAPN4I_I10_A_2: CN13.1(A<0>) D13.1(A1) D13.10(B1) PX52.1(A) RZ13.8(B<0>)
UNNAMED_1_CAPN4I_I10_A_2_1: CN9.5(A<0>) D9.4(A3) D9.7(B3) PX44.1(A) RZ9.6(B<0>)
UNNAMED_1_CAPN4I_I10_A_2_2: CN13.5(A<0>) D13.4(A3) D13.7(B3) PX59.1(A) RZ13.6(B<0>)
UNNAMED_1_CAPN4I_I10_A_2_3: CN11.5(A<0>) D11.4(A3) D11.7(B3) PX47.1(A) RZ11.6(B<0>)
UNNAMED_1_CAPN4I_I10_A_2_4: CN15.5(A<0>) D15.4(A3) D15.7(B3) PX63.1(A) RZ15.6(B<0>)
UNNAMED_1_CAPN4I_I10_A_2_5: CN16.5(A<0>) D16.4(A3) D16.7(B3) PX61.1(A) RZ16.6(B<0>)
UNNAMED_1_CAPN4I_I10_A_2_6: CN12.5(A<0>) D12.4(A3) D12.7(B3) PX45.1(A) RZ12.6(B<0>)
UNNAMED_1_CAPN4I_I10_A_2_7: CN10.5(A<0>) D10.4(A3) D10.7(B3) PX33.1(A) RZ10.6(B<0>)
UNNAMED_1_CAPN4I_I10_A_2_8: CN14.5(A<0>) D14.4(A3) D14.7(B3) PX57.1(A) RZ14.6(B<0>)
UNNAMED_1_CAPN4I_I10_A_2_9: CN8.5(A<0>) D8.4(A3) D8.7(B3) PX21.1(A) RZ8.6(B<0>)
UNNAMED_1_CAPN4I_I10_A_2_10: CN4.5(A<0>) D4.4(A3) D4.7(B3) PX6.1(A) RZ4.6(B<0>)
UNNAMED_1_CAPN4I_I10_A_2_11: CN2.5(A<0>) D2.4(A3) D2.7(B3) PX2.1(A) RZ2.6(B<0>)
UNNAMED_1_CAPN4I_I10_A_2_12: CN6.5(A<0>) D6.4(A3) D6.7(B3) PX18.1(A) RZ6.6(B<0>)
UNNAMED_1_CAPN4I_I10_A_2_13: CN1.5(A<0>) D1.4(A3) D1.7(B3) PX4.1(A) RZ1.6(B<0>)
UNNAMED_1_CAPN4I_I10_A_2_14: CN5.5(A<0>) D5.4(A3) D5.7(B3) PX20.1(A) RZ5.6(B<0>)
UNNAMED_1_CAPN4I_I10_A_2_15: CN7.5(A<0>) D7.4(A3) D7.7(B3) PX32.1(A) RZ7.6(B<0>)
UNNAMED_1_CAPN4I_I10_A_2_16: CN3.5(A<0>) D3.4(A3) D3.7(B3) PX8.1(A) RZ3.6(B<0>)
UNNAMED_1_CAPN4I_I10_A_3: CN11.1(A<0>) D11.1(A1) D11.10(B1) PX40.1(A) RZ11.8(B<0>)
UNNAMED_1_CAPN4I_I10_A_3_1: CN9.7(A<0>) D9.5(A4) D9.6(B4) PX43.1(A) RZ9.5(B<0>)
UNNAMED_1_CAPN4I_I10_A_3_2: CN13.7(A<0>) D13.5(A4) D13.6(B4) PX51.1(A) RZ13.5(B<0>)
UNNAMED_1_CAPN4I_I10_A_3_3: CN11.7(A<0>) D11.5(A4) D11.6(B4) PX39.1(A) RZ11.5(B<0>)
UNNAMED_1_CAPN4I_I10_A_3_4: CN15.7(A<0>) D15.5(A4) D15.6(B4) PX55.1(A) RZ15.5(B<0>)
UNNAMED_1_CAPN4I_I10_A_3_5: CN16.7(A<0>) D16.5(A4) D16.6(B4) PX53.1(A) RZ16.5(B<0>)
UNNAMED_1_CAPN4I_I10_A_3_6: CN12.7(A<0>) D12.5(A4) D12.6(B4) PX37.1(A) RZ12.5(B<0>)
UNNAMED_1_CAPN4I_I10_A_3_7: CN10.7(A<0>) D10.5(A4) D10.6(B4) PX34.1(A) RZ10.5(B<0>)
UNNAMED_1_CAPN4I_I10_A_3_8: CN14.7(A<0>) D14.5(A4) D14.6(B4) PX49.1(A) RZ14.5(B<0>)
UNNAMED_1_CAPN4I_I10_A_3_9: CN8.7(A<0>) D8.5(A4) D8.6(B4) PX22.1(A) RZ8.5(B<0>)
UNNAMED_1_CAPN4I_I10_A_3_10: CN4.7(A<0>) D4.5(A4) D4.6(B4) PX14.1(A) RZ4.5(B<0>)
UNNAMED_1_CAPN4I_I10_A_3_11: CN2.7(A<0>) D2.5(A4) D2.6(B4) PX10.1(A) RZ2.5(B<0>)
UNNAMED_1_CAPN4I_I10_A_3_12: CN6.7(A<0>) D6.5(A4) D6.6(B4) PX26.1(A) RZ6.5(B<0>)
UNNAMED_1_CAPN4I_I10_A_3_13: CN1.7(A<0>) D1.5(A4) D1.6(B4) PX12.1(A) RZ1.5(B<0>)
UNNAMED_1_CAPN4I_I10_A_3_14: CN5.7(A<0>) D5.5(A4) D5.6(B4) PX28.1(A) RZ5.5(B<0>)
UNNAMED_1_CAPN4I_I10_A_3_15: CN7.7(A<0>) D7.5(A4) D7.6(B4) PX31.1(A) RZ7.5(B<0>)
UNNAMED_1_CAPN4I_I10_A_3_16: CN3.7(A<0>) D3.5(A4) D3.6(B4) PX16.1(A) RZ3.5(B<0>)
UNNAMED_1_CAPN4I_I10_A_4: CN15.1(A<0>) D15.1(A1) D15.10(B1) PX56.1(A) RZ15.8(B<0>)
UNNAMED_1_CAPN4I_I10_A_5: CN16.1(A<0>) D16.1(A1) D16.10(B1) PX54.1(A) RZ16.8(B<0>)
UNNAMED_1_CAPN4I_I10_A_6: CN12.1(A<0>) D12.1(A1) D12.10(B1) PX38.1(A) RZ12.8(B<0>)
UNNAMED_1_CAPN4I_I10_A_7: CN10.1(A<0>) D10.1(A1) D10.10(B1) PX42.1(A) RZ10.8(B<0>)
UNNAMED_1_CAPN4I_I10_A_8: CN14.1(A<0>) D14.1(A1) D14.10(B1) PX50.1(A) RZ14.8(B<0>)
UNNAMED_1_CAPN4I_I10_A_9: CN8.1(A<0>) D8.1(A1) D8.10(B1) PX30.1(A) RZ8.8(B<0>)
UNNAMED_1_CAPN4I_I10_A_10: CN4.1(A<0>) D4.1(A1) D4.10(B1) PX13.1(A) RZ4.8(B<0>)
UNNAMED_1_CAPN4I_I10_A_11: CN2.1(A<0>) D2.1(A1) D2.10(B1) PX9.1(A) RZ2.8(B<0>)
UNNAMED_1_CAPN4I_I10_A_12: CN6.1(A<0>) D6.1(A1) D6.10(B1) PX25.1(A) RZ6.8(B<0>)
UNNAMED_1_CAPN4I_I10_A_13: CN1.1(A<0>) D1.1(A1) D1.10(B1) PX11.1(A) RZ1.8(B<0>)
UNNAMED_1_CAPN4I_I10_A_14: CN5.1(A<0>) D5.1(A1) D5.10(B1) PX27.1(A) RZ5.8(B<0>)
UNNAMED_1_CAPN4I_I10_A_15: CN7.1(A<0>) D7.1(A1) D7.10(B1) PX23.1(A) RZ7.8(B<0>)
UNNAMED_1_CAPN4I_I10_A_16: CN3.1(A<0>) D3.1(A1) D3.10(B1) PX15.1(A) RZ3.8(B<0>)

Pads without a net: NOREF 1; NOREF#4 1; NOREF#5 1; NOREF#7 1; NOREF#8 1; NOREF#9 1; NOREF#10 1; NOREF#11 1; NOREF#12 1; NOREF#13 1; NOREF#14 1; NOREF#17 1; NOREF#18 1; NOREF#19 1; NOREF#20 1; NOREF#21 1

## Via types
v1: diameter 0.61, hole 0.33, TOP to BOTTOM, 176 vias

## Routing (per net, layer and track width the routed paths; a pad name or vN(x,y) marks a point on that pad's centre or on a via; arc(x,y) is an arc through that point)
GND_SIGNAL: length 2677
  TOP w0.18: v1(150.9,110) D8.8 D8.3 v1(153.5,110) ; v1(70,59.1) D11.8 D11.3 v1(70,56.5) ; v1(110,120.9) D6.8 D6.3 v1(110,123.5) ; v1(26.5,110) D7.3 D7.8 v1(29.1,110) ; v1(110,163.5) D2.3 D2.8 v1(110,160.9) ; v1(150,26.5) D14.3 D14.8 v1(150,29.1) ; v1(110,19.1) D16.8 D16.3 v1(110,16.5) ; v1(110,59.1) D12.8 D12.3 v1(110,56.5) ; v1(70,120.9) D5.8 D5.3 v1(70,123.5) ; v1(150,153.5) D4.3 D4.8 v1(150,150.9) ; v1(150.9,70) D10.8 D10.3 v1(153.5,70) ; v1(30,29.1) D13.8 D13.3 v1(30,26.5) ; v1(70,160.9) D1.8 D1.3 v1(70,163.5) ; v1(26.5,70) D9.3 D9.8 v1(29.1,70) ; v1(70,19.1) D15.8 D15.3 v1(70,16.5) ; v1(30,150.9) D3.8 D3.3 v1(30,153.5)
  TOP w0.226: 117.45,126.34 PX17.3 ; PX17.3 118.58,127.47 ; PX17.3 117.45,128.59 ; PX17.3 116.33,127.47 ; 97.47,73.66 PX38.2 97.47,71.41 ; 16.33,122.53 PX24.5 ; PX24.5 17.45,123.66 ; PX24.5 18.58,122.53 ; PX24.5 17.45,121.41 ; 102.53,126.34 PX18.2 ; PX18.2 101.41,127.47 ; PX18.2 103.66,127.47 ; PX18.2 102.53,128.59 ; PX42.4 142.55,63.67 ; PX42.4 141.42,62.55 ; PX42.4 142.55,61.42 ; PX42.4 143.67,62.55 ; 41.41,62.53 PX43.2 ; PX43.2 42.53,61.41 ; PX43.2 43.66,62.53 ; PX43.2 42.53,63.66 ; PX37.5 118.59,67.45 ; PX37.5 116.34,67.45 ; PX37.5 117.47,66.33 ; PX37.5 117.47,68.58 ; 156.34,42.53 PX49.2 ; PX49.2 157.47,41.41 ; PX49.2 158.59,42.53 ; PX49.2 157.47,43.66 ; 101.42,72.53 PX38.3 ; PX38.3 103.67,72.53 ; PX38.3 102.55,71.41 ; PX38.3 102.55,73.66 ; 16.33,102.53 PX32.5 ; PX32.5 17.45,101.41 ; PX32.5 17.45,103.66 ; PX32.5 18.58,102.53 ; PX20.5 62.53,133.67 ; PX20.5 61.41,132.55 ; PX20.5 63.66,132.55 ; PX20.5 62.53,131.42 ; 37.45,156.34 PX7.3 ; PX7.3 36.33,157.47 ; PX7.3 37.45,158.59 ; PX7.3 38.58,157.47 ; 82.53,111.42 PX27.5 ; PX27.5 81.41,112.55 ; PX27.5 83.66,112.55 ; PX27.5 82.53,113.67 ; PX53.3 123.67,32.53 ; PX53.3 122.55,31.41 ; PX53.3 121.42,32.53 ; PX53.3 122.55,33.66 ; 41.42,22.53 PX59.3 ; PX59.3 42.55,21.41 ; PX59.3 43.67,22.53 ; PX59.3 42.55,23.66 ; PX63.3 82.55,13.66 ; PX63.3 82.55,11.41 ; PX63.3 83.67,12.53 ; PX63.3 81.42,12.53 ; 42.53,78.58 PX35.3 41.41,77.45 ; 142.53,156.34 PX6.2 ; PX6.2 141.41,157.47 ; PX6.2 143.66,157.47 ; PX6.2 142.53,158.59 ; 137.47,56.34 PX42.2 ; PX42.2 137.47,58.59 ; PX42.2 136.34,57.47 ; PX42.2 138.59,57.47 ; PX60.5 17.47,18.58 ; PX60.5 18.59,17.45 ; PX60.5 16.34,17.45 ; PX60.5 17.47,16.33 ; PX24.2 23.66,122.53 ; PX24.2 22.53,121.41 ; PX24.2 22.53,123.66 ; PX24.2 21.41,122.53 ; 101.41,147.47 PX10.2 ; PX10.2 102.53,146.34 ; PX10.2 102.53,148.59 ; PX10.2 103.66,147.47 ; PX25.5 122.53,113.67 ; PX25.5 121.41,112.55 ; PX25.5 122.53,111.42 ; 57.45,171.42 PX4.4 ; PX4.4 58.58,172.55 ; PX4.4 56.33,172.55 ; PX4.4 57.45,173.67 ; 36.34,22.53 PX59.2 ; PX59.2 37.47,23.66 ; PX59.2 37.47,21.41 ; PX59.2 38.59,22.53 ; PX12.4 57.45,153.67 ; PX12.4 57.45,151.42 ; PX12.4 56.33,152.55 ; PX12.4 58.58,152.55 ; PX36.3 23.66,77.45 ; PX36.3 22.53,78.58 ; PX36.3 21.41,77.45 ; PX36.3 22.53,76.33 ; 62.55,31.41 PX56.3 ; PX56.3 61.42,32.53 ; PX56.3 62.55,33.66 ; PX56.3 63.67,32.53 ; PX21.2 158.59,117.47 ; PX21.2 157.47,116.34 ; PX21.2 156.34,117.47 ; PX21.2 157.47,118.59 ; PX52.3 22.55,43.66 ; PX52.3 22.55,41.41 ; PX52.3 21.42,42.53 ; PX52.3 23.67,42.53 ; 22.55,16.33 PX60.4 ; PX60.4 21.42,17.45 ; PX60.4 22.55,18.58 ; PX60.4 23.67,17.45 ; PX41.5 162.55,58.59 ; PX41.5 162.55,56.34 ; PX41.5 163.67,57.47 ; PX41.5 161.42,57.47 ; PX49.3 162.55,43.66 ; PX49.3 162.55,41.41 ; PX49.3 161.42,42.53 ; PX49.3 163.67,42.53 ; PX58.4 142.55,18.58 ; PX58.4 142.55,16.33 ; PX58.4 141.42,17.45 ; PX58.4 143.67,17.45 ; PX54.4 102.55,28.58 ; PX54.4 103.67,27.45 ; PX54.4 102.55,26.33 ; PX54.4 101.42,27.45 ; 117.47,46.33 PX45.5 ; PX45.5 116.34,47.45 ; PX45.5 118.59,47.45 ; PX45.5 117.47,48.58 ; PX17.4 118.58,132.55 ; PX17.4 116.33,132.55 ; PX17.4 117.45,133.67 ; PX17.4 117.45,131.42 ; PX60.2 17.47,23.66 ; PX60.2 18.59,22.53 ; PX60.2 16.34,22.53 ; PX60.2 17.47,21.41 ; 36.33,142.55 PX15.4 ; PX15.4 37.45,141.42 ; PX15.4 37.45,143.67 ; PX15.4 38.58,142.55 ; PX38.4 103.67,67.45 ; PX38.4 102.55,66.33 ; PX38.4 102.55,68.58 ; PX38.4 101.42,67.45 ; 157.47,81.42 PX33.3 ; PX33.3 157.47,83.67 ; PX33.3 156.34,82.55 ; PX33.3 158.59,82.55 ; PX24.3 22.53,118.58 ; PX24.3 22.53,116.33 ; PX24.3 23.66,117.45 ; PX24.3 21.41,117.45 ; 61.41,167.47 PX4.2 ; PX4.2 63.66,167.47 ; PX4.2 62.53,168.59 ; PX4.2 62.53,166.34 ; PX9.5 122.53,153.67 ; PX9.5 123.66,152.55 ; PX9.5 122.53,151.42 ; PX9.5 121.41,152.55 ; PX33.5 162.55,78.59 ; PX33.5 161.42,77.47 ; PX33.5 163.67,77.47 ; PX33.5 162.55,76.34 ; 157.47,21.41 PX57.2 ; PX57.2 156.34,22.53 ; PX57.2 158.59,22.53 ; PX57.2 157.47,23.66 ; PX30.2 137.47,98.59 ; PX30.2 136.34,97.47 ; PX30.2 138.59,97.47 ; PX30.2 137.47,96.34 ; 101.41,107.47 PX26.2 ; PX26.2 103.66,107.47 ; PX26.2 102.53,108.59 ; PX26.2 102.53,106.34 ; 137.47,21.41 PX58.2 ; PX58.2 136.34,22.53 ; PX58.2 137.47,23.66 ; PX58.2 138.59,22.53 ; 156.34,62.55 PX41.3 ; PX41.3 157.47,63.67 ; PX41.3 158.59,62.55 ; PX41.3 157.47,61.42 ; 62.55,26.33 PX56.4 ; PX56.4 61.42,27.45 ; PX56.4 62.55,28.58 ; PX56.4 63.67,27.45 ; PX28.3 58.58,107.47 ; PX28.3 57.45,108.59 ; PX28.3 56.33,107.47 ; 97.45,151.42 PX10.4 ; PX10.4 97.45,153.67 ; PX10.4 96.33,152.55 ; PX10.4 98.58,152.55 ; 141.42,117.47 PX22.5 ; PX22.5 142.55,116.34 ; PX22.5 143.67,117.47 ; PX22.5 142.55,118.59 ; 77.47,46.33 PX47.5 ; PX47.5 76.34,47.45 ; PX47.5 78.59,47.45 ; PX47.5 77.47,48.58 ; 56.33,127.47 PX20.3 ; PX20.3 57.45,126.34 ; PX20.3 58.58,127.47 ; PX20.3 57.45,128.59 ; 97.45,108.59 PX26.3 97.45,106.34 ; 116.33,167.47 PX1.3 ; PX1.3 117.45,166.34 ; PX1.3 118.58,167.47 ; PX1.3 117.45,168.59 ; PX43.3 43.66,57.45 ; PX43.3 42.53,56.33 ; PX43.3 41.41,57.45 ; PX43.3 42.53,58.58 ; PX31.3 42.53,98.58 ; PX31.3 42.53,96.33 ; PX31.3 41.41,97.45 ; PX31.3 43.66,97.45 ; 82.55,73.66 PX39.3 81.42,72.53 ; PX13.2 162.53,138.59 ; PX13.2 162.53,136.34 ; PX13.2 161.41,137.47 ; PX13.2 163.66,137.47 ; PX29.4 162.55,103.67 ; PX29.4 163.67,102.55 ; PX29.4 161.42,102.55 ; PX29.4 162.55,101.42 ; 137.47,41.41 PX50.2 ; PX50.2 136.34,42.53 ; PX50.2 137.47,43.66 ; PX50.2 138.59,42.53 ; PX44.2 22.53,63.66 ; PX44.2 23.66,62.53 ; PX44.2 22.53,61.41 ; PX44.2 21.41,62.53 ; PX54.2 98.59,32.53 ; PX54.2 96.34,32.53 ; PX54.2 97.47,33.66 ; PX54.2 97.47,31.41 ; 82.55,68.58 PX39.4 82.55,66.33 ; 157.47,101.42 PX29.3 ; PX29.3 157.47,103.67 ; PX29.3 156.34,102.55 ; PX29.3 158.59,102.55 ; 56.34,47.45 PX48.5 ; PX48.5 57.47,48.58 ; PX48.5 58.59,47.45 ; PX48.5 57.47,46.33 ; 77.47,26.33 PX55.5 ; PX55.5 78.59,27.45 ; PX55.5 77.47,28.58 ; PX55.5 76.34,27.45 ; PX6.5 143.66,162.55 ; PX6.5 142.53,161.42 ; PX6.5 142.53,163.67 ; PX6.5 141.41,162.55 ; 111.2,166.3 RZ2.1 ; PX54.5 98.59,27.45 ; PX54.5 96.34,27.45 ; PX54.5 97.47,26.33 ; PX54.5 97.47,28.58 ; 41.41,157.47 PX7.2 ; PX7.2 42.53,158.59 ; PX7.2 42.53,156.34 ; PX7.2 43.66,157.47 ; PX61.4 123.67,7.45 ; PX61.4 121.42,7.45 ; PX61.4 122.55,8.58 ; PX61.4 122.55,6.33 ; PX5.3 158.58,157.47 ; PX5.3 157.45,156.34 ; PX5.3 157.45,158.59 ; PX5.3 156.33,157.47 ; 156.3,68.8 RZ10.1 ; 156.34,77.47 PX33.2 ; PX33.2 158.59,77.47 ; PX33.2 157.47,78.59 ; PX33.2 157.47,76.34 ; 137.45,156.34 PX6.3 ; PX6.3 138.58,157.47 ; PX6.3 136.33,157.47 ; PX6.3 137.45,158.59 ; 97.45,113.67 PX26.4 97.45,111.42 ; 102.53,131.42 PX18.5 ; PX18.5 101.41,132.55 ; PX18.5 103.66,132.55 ; PX18.5 102.53,133.67 ; 141.42,122.55 PX22.4 ; PX22.4 143.67,122.55 ; PX22.4 142.55,121.42 ; PX22.4 142.55,123.67 ; 136.34,122.55 PX22.3 ; PX22.3 138.59,122.55 ; PX22.3 137.47,121.42 ; 61.42,72.53 PX40.3 ; PX40.3 62.55,71.41 ; PX40.3 63.67,72.53 ; PX40.3 62.55,73.66 ; 116.33,112.55 PX25.4 ; PX25.4 117.45,111.42 ; PX25.4 118.58,112.55 ; PX25.4 117.45,113.67 ; 137.47,36.33 PX50.5 ; PX50.5 136.34,37.45 ; PX50.5 137.47,38.58 ; PX50.5 138.59,37.45 ; PX30.5 142.55,98.59 ; PX30.5 142.55,96.34 ; PX30.5 141.42,97.47 ; PX30.5 143.67,97.47 ; 162.55,121.42 PX21.4 ; PX21.4 161.42,122.55 ; PX21.4 162.55,123.67 ; PX21.4 163.67,122.55 ; PX44.3 23.66,57.45 ; PX44.3 22.53,56.33 ; PX44.3 22.53,58.58 ; PX44.3 21.41,57.45 ; 62.53,111.42 PX28.5 ; PX28.5 62.53,113.67 ; PX28.5 61.41,112.55 ; PX28.5 63.66,112.55 ; 121.42,67.45 PX37.4 ; PX37.4 123.67,67.45 ; PX37.4 122.55,66.33 ; PX37.4 122.55,68.58 ; 108.8,53.7 RZ12.1 ; 161.42,37.45 PX49.4 ; PX49.4 163.67,37.45 ; PX49.4 162.55,36.33 ; PX49.4 162.55,38.58 ; 142.55,21.41 PX58.3 ; PX58.3 142.55,23.66 ; PX58.3 143.67,22.53 ; PX58.3 141.42,22.53 ; PX7.4 37.45,163.67 ; PX7.4 38.58,162.55 ; PX7.4 36.33,162.55 ; PX7.4 37.45,161.42 ; 42.55,41.41 PX51.3 ; PX51.3 42.55,43.66 ; PX51.3 41.42,42.53 ; PX51.3 43.67,42.53 ; PX32.3 22.53,98.58 ; PX32.3 21.41,97.45 ; PX32.3 23.66,97.45 ; PX32.3 22.53,96.33 ; PX23.2 42.53,123.66 ; PX23.2 41.41,122.53 ; PX23.2 43.66,122.53 ; PX23.2 42.53,121.41 ; PX9.3 118.58,147.47 ; PX9.3 116.33,147.47 ; PX9.3 117.45,148.59 ; PX9.3 117.45,146.34 ; PX34.3 138.59,82.55 ; PX34.3 136.34,82.55 ; PX34.3 137.47,81.42 ; PX34.3 137.47,83.67 ; PX20.4 57.45,133.67 ; PX20.4 56.33,132.55 ; PX20.4 57.45,131.42 ; PX20.4 58.58,132.55 ; 101.42,52.53 PX46.3 ; PX46.3 102.55,53.66 ; PX46.3 103.67,52.53 ; PX46.3 102.55,51.41 ; PX14.4 138.58,142.55 ; PX14.4 137.45,143.67 ; PX14.4 137.45,141.42 ; PX14.4 136.33,142.55 ; 81.41,172.55 PX3.5 ; PX3.5 83.66,172.55 ; PX3.5 82.53,173.67 ; PX3.5 82.53,171.42 ; PX60.3 23.67,22.53 ; PX60.3 22.55,23.66 ; PX60.3 22.55,21.41 ; PX60.3 21.42,22.53 ; 56.33,167.47 PX4.3 ; PX4.3 57.45,168.59 ; PX4.3 58.58,167.47 ; PX4.3 57.45,166.34 ; 61.42,7.45 PX64.4 ; PX64.4 62.55,6.33 ; PX64.4 62.55,8.58 ; PX64.4 63.67,7.45 ; PX23.5 37.45,123.66 ; PX23.5 36.33,122.53 ; PX23.5 37.45,121.41 ; PX23.5 38.58,122.53 ; PX63.4 82.55,8.58 ; PX63.4 82.55,6.33 ; PX63.4 83.67,7.45 ; PX63.4 81.42,7.45 ; 161.41,162.55 PX5.5 ; PX5.5 162.53,163.67 ; PX5.5 162.53,161.42 ; PX5.5 163.66,162.55 ; PX49.5 158.59,37.45 ; PX49.5 157.47,36.33 ; PX49.5 157.47,38.58 ; PX49.5 156.34,37.45 ; PX43.4 37.45,58.58 ; PX43.4 38.58,57.45 ; PX43.4 36.33,57.45 ; PX43.4 37.45,56.33 ; PX61.2 118.59,12.53 ; PX61.2 117.47,13.66 ; PX61.2 116.34,12.53 ; PX61.2 117.47,11.41 ; PX34.4 142.55,83.67 ; PX34.4 143.67,82.55 ; PX34.4 141.42,82.55 ; PX34.4 142.55,81.42 ; 41.41,162.55 PX7.5 ; PX7.5 42.53,161.42 ; PX7.5 42.53,163.67 ; PX7.5 43.66,162.55 ; PX42.5 143.67,57.47 ; PX42.5 141.42,57.47 ; PX42.5 142.55,58.59 ; PX42.5 142.55,56.34 ; 81.41,147.47 PX11.2 ; PX11.2 82.53,146.34 ; PX11.2 82.53,148.59 ; PX11.2 83.66,147.47 ; PX12.5 62.53,153.67 ; PX12.5 61.41,152.55 ; PX12.5 63.66,152.55 ; PX12.5 62.53,151.42 ; 101.75,92.85 J1.49 102.38,94.42 ; 96.34,52.53 PX46.2 ; PX46.2 97.47,51.41 ; PX46.2 98.59,52.53 ; PX46.2 97.47,53.66 ; PX31.5 37.45,103.66 ; PX31.5 37.45,101.41 ; PX31.5 36.33,102.53 ; PX31.5 38.58,102.53 ; 156.33,137.47 PX13.3 ; PX13.3 158.58,137.47 ; PX13.3 157.45,138.59 ; PX13.3 157.45,136.34 ; 122.55,46.33 PX45.4 ; PX45.4 123.67,47.45 ; PX45.4 121.42,47.45 ; PX45.4 122.55,48.58 ; 122.53,131.42 PX17.5 ; PX17.5 121.41,132.55 ; PX17.5 122.53,133.67 ; PX17.5 123.66,132.55 ; 41.41,142.55 PX15.5 ; PX15.5 42.53,143.67 ; PX15.5 42.53,141.42 ; PX15.5 43.66,142.55 ; 96.34,47.45 PX46.5 ; PX46.5 98.59,47.45 ; PX46.5 97.47,48.58 ; PX46.5 97.47,46.33 ; 77.47,11.41 PX63.2 ; PX63.2 76.34,12.53 ; PX63.2 77.47,13.66 ; PX63.2 78.59,12.53 ; 21.41,157.47 PX8.2 ; PX8.2 22.53,158.59 ; PX8.2 22.53,156.34 ; PX8.2 23.66,157.47 ; PX16.3 18.58,137.47 ; PX16.3 17.45,136.34 ; PX16.3 16.33,137.47 ; PX16.3 17.45,138.59 ; 42.55,36.33 PX51.4 ; PX51.4 41.42,37.45 ; PX51.4 43.67,37.45 ; PX51.4 42.55,38.58 ; 22.55,36.33 PX52.4 ; PX52.4 22.55,38.58 ; PX52.4 23.67,37.45 ; PX52.4 21.42,37.45 ; PX11.4 78.58,152.55 ; PX11.4 76.33,152.55 ; PX11.4 77.45,151.42 ; PX11.4 77.45,153.67 ; 141.42,37.45 PX50.4 ; PX50.4 142.55,36.33 ; PX50.4 142.55,38.58 ; PX50.4 143.67,37.45 ; PX21.5 163.67,117.47 ; PX21.5 161.42,117.47 ; PX21.5 162.55,118.59 ; PX21.5 162.55,116.34 ; 22.53,161.42 PX8.5 ; PX8.5 22.53,163.67 ; PX8.5 23.66,162.55 ; PX8.5 21.41,162.55 ; PX55.4 83.67,27.45 ; PX55.4 81.42,27.45 ; PX55.4 82.55,28.58 ; PX55.4 82.55,26.33 ; PX16.4 18.58,142.55 ; PX16.4 16.33,142.55 ; PX16.4 17.45,141.42 ; PX16.4 17.45,143.67 ; 141.41,142.55 PX14.5 ; PX14.5 143.66,142.55 ; PX14.5 142.53,143.67 ; PX14.5 142.53,141.42 ; PX9.2 122.53,148.59 ; PX9.2 121.41,147.47 ; PX9.2 123.66,147.47 ; PX9.2 122.53,146.34 ; PX1.2 123.66,167.47 ; PX1.2 122.53,168.59 ; PX1.2 121.41,167.47 ; PX1.2 122.53,166.34 ; PX42.3 138.59,62.55 ; PX42.3 136.34,62.55 ; PX42.3 137.47,61.42 ; PX42.3 137.47,63.67 ; 61.41,127.47 PX20.2 ; PX20.2 62.53,128.59 ; PX20.2 62.53,126.34 ; PX20.2 63.66,127.47 ; PX48.3 63.67,52.53 ; PX48.3 61.42,52.53 ; PX48.3 62.55,53.66 ; PX48.3 62.55,51.41 ; 37.47,36.33 PX51.5 ; PX51.5 37.47,38.58 ; PX51.5 38.59,37.45 ; PX51.5 36.34,37.45 ; 157.47,96.34 PX29.2 ; PX29.2 156.34,97.47 ; PX29.2 158.59,97.47 ; PX29.2 157.47,98.59 ; PX26.5 102.53,113.67 ; PX26.5 103.66,112.55 ; PX26.5 101.41,112.55 ; PX26.5 102.53,111.42 ; 161.41,157.47 PX5.2 ; PX5.2 162.53,156.34 ; PX5.2 163.66,157.47 ; PX5.2 162.53,158.59 ; 41.41,102.53 PX31.2 42.53,101.41 ; PX6.4 138.58,162.55 ; PX6.4 137.45,163.67 ; PX6.4 137.45,161.42 ; PX6.4 136.33,162.55 ; PX9.4 117.45,153.67 ; PX9.4 118.58,152.55 ; PX9.4 117.45,151.42 ; PX9.4 116.33,152.55 ; 61.42,47.45 PX48.4 ; PX48.4 63.67,47.45 ; PX48.4 62.55,48.58 ; PX48.4 62.55,46.33 ; 77.45,146.34 PX11.3 ; PX11.3 78.58,147.47 ; PX11.3 76.33,147.47 ; PX11.3 77.45,148.59 ; 111.2,126.3 RZ6.1 ; PX62.3 102.55,13.66 ; PX62.3 103.67,12.53 ; PX62.3 101.42,12.53 ; PX62.3 102.55,11.41 ; 162.55,61.42 PX41.4 ; PX41.4 161.42,62.55 ; PX41.4 162.55,63.67 ; PX41.4 163.67,62.55 ; 57.47,71.41 PX40.2 58.59,72.53 ; PX36.4 17.45,78.58 ; PX36.4 16.33,77.45 ; PX36.4 18.58,77.45 ; PX36.4 17.45,76.33 ; PX27.4 78.58,112.55 ; PX27.4 76.33,112.55 ; PX27.4 77.45,113.67 ; PX27.4 77.45,111.42 ; PX2.5 102.53,173.67 ; PX2.5 103.66,172.55 ; PX2.5 102.53,171.42 ; PX2.5 101.41,172.55 ; PX45.3 122.55,53.66 ; PX45.3 122.55,51.41 ; PX45.3 121.42,52.53 ; PX45.3 123.67,52.53 ; 37.47,41.41 PX51.2 38.59,42.53 ; PX16.2 22.53,138.59 ; PX16.2 23.66,137.47 ; PX16.2 22.53,136.34 ; PX16.2 21.41,137.47 ; PX61.3 122.55,13.66 ; PX61.3 121.42,12.53 ; PX61.3 122.55,11.41 ; PX61.3 123.67,12.53 ; 77.47,66.33 PX39.5 ; PX39.5 78.59,67.45 ; PX39.5 77.47,68.58 ; PX39.5 76.34,67.45 ; PX56.5 58.59,27.45 ; PX56.5 57.47,28.58 ; PX56.5 57.47,26.33 ; PX56.5 56.34,27.45 ; PX41.2 157.47,58.59 ; PX41.2 156.34,57.47 ; PX41.2 157.47,56.34 ; PX41.2 158.59,57.47 ; 16.34,42.53 PX52.2 ; PX52.2 18.59,42.53 ; PX52.2 17.47,43.66 ; PX52.2 17.47,41.41 ; PX44.4 18.58,57.45 ; PX44.4 17.45,56.33 ; PX44.4 17.45,58.58 ; PX44.4 16.33,57.45 ; PX36.2 22.53,83.66 ; PX36.2 22.53,81.41 ; PX36.2 21.41,82.53 ; PX36.2 23.66,82.53 ; 117.45,106.34 PX25.3 ; PX25.3 118.58,107.47 ; PX25.3 116.33,107.47 ; PX25.3 117.45,108.59 ; 77.45,108.59 PX27.3 78.58,107.47 ; 81.41,167.47 PX3.2 ; PX3.2 83.66,167.47 ; PX3.2 82.53,168.59 ; PX3.2 82.53,166.34 ; 28.8,23.7 RZ13.1 ; PX13.5 163.66,142.55 ; PX13.5 162.53,143.67 ; PX13.5 161.41,142.55 ; PX13.5 162.53,141.42 ; PX63.5 77.47,8.58 ; PX63.5 78.59,7.45 ; PX63.5 76.34,7.45 ; PX63.5 77.47,6.33 ; PX62.5 97.47,8.58 ; PX62.5 98.59,7.45 ; PX62.5 97.47,6.33 ; PX62.5 96.34,7.45 ; 97.45,126.34 PX18.3 97.45,128.59 ; PX64.3 62.55,13.66 ; PX64.3 62.55,11.41 ; PX64.3 61.42,12.53 ; PX64.3 63.67,12.53 ; 142.55,101.42 PX30.4 ; PX30.4 142.55,103.67 ; PX30.4 141.42,102.55 ; PX30.4 143.67,102.55 ; PX2.4 98.58,172.55 ; PX2.4 97.45,173.67 ; PX2.4 96.33,172.55 ; PX2.4 97.45,171.42 ; PX28.2 63.66,107.47 ; PX28.2 62.53,108.59 ; PX28.2 61.41,107.47 ; 116.34,27.45 PX53.5 ; PX53.5 117.47,28.58 ; PX53.5 118.59,27.45 ; PX53.5 117.47,26.33 ; 16.33,162.55 PX8.4 ; PX8.4 18.58,162.55 ; PX8.4 17.45,163.67 ; PX8.4 17.45,161.42 ; PX31.4 37.45,98.58 ; PX31.4 38.58,97.45 ; PX31.4 37.45,96.33 ; PX31.4 36.33,97.45 ; PX52.5 17.47,38.58 ; PX52.5 17.47,36.33 ; PX52.5 16.34,37.45 ; PX52.5 18.59,37.45 ; PX62.2 98.59,12.53 ; PX62.2 97.47,11.41 ; PX62.2 96.34,12.53 ; PX62.2 97.47,13.66 ; PX53.2 117.47,33.66 ; PX53.2 116.34,32.53 ; PX53.2 118.59,32.53 ; PX53.2 117.47,31.41 ; 77.45,131.42 PX19.4 ; PX19.4 78.58,132.55 ; PX19.4 77.45,133.67 ; PX19.4 76.33,132.55 ; 141.42,77.47 PX34.5 ; PX34.5 143.67,77.47 ; PX34.5 142.55,78.59 ; PX34.5 142.55,76.34 ; 36.34,17.45 PX59.5 ; PX59.5 37.47,16.33 ; PX59.5 38.59,17.45 ; PX59.5 37.47,18.58 ; 21.41,142.55 PX16.5 ; PX16.5 22.53,143.67 ; PX16.5 23.66,142.55 ; PX16.5 22.53,141.42 ; 97.47,66.33 PX38.5 97.47,68.58 ; PX40.4 63.67,67.45 ; PX40.4 62.55,66.33 ; PX40.4 61.42,67.45 ; PX40.4 62.55,68.58 ; 81.42,32.53 PX55.3 ; PX55.3 83.67,32.53 ; PX55.3 82.55,31.41 ; PX55.3 82.55,33.66 ; 77.45,126.34 PX19.3 ; PX19.3 76.33,127.47 ; PX19.3 77.45,128.59 ; PX19.3 78.58,127.47 ; 56.33,112.55 PX28.4 ; PX28.4 57.45,111.42 ; PX28.4 58.58,112.55 ; PX28.4 57.45,113.67 ; PX64.2 58.59,12.53 ; PX64.2 56.34,12.53 ; PX64.2 57.47,11.41 ; PX64.2 57.47,13.66 ; 61.41,172.55 PX4.5 ; PX4.5 63.66,172.55 ; PX4.5 62.53,173.67 ; PX4.5 62.53,171.42 ; 141.42,42.53 PX50.3 142.55,41.41 ; J1.144 v1(64.28,85.39) ; PX22.2 138.59,117.47 ; PX22.2 136.34,117.47 ; PX22.2 137.47,118.59 ; PX22.2 137.47,116.34 ; PX34.2 137.47,78.59 ; PX34.2 137.47,76.34 ; PX34.2 136.34,77.47 ; PX34.2 138.59,77.47 ; PX29.5 162.55,98.59 ; PX29.5 163.67,97.47 ; PX29.5 162.55,96.34 ; PX29.5 161.42,97.47 ; PX64.5 57.47,8.58 ; PX64.5 58.59,7.45 ; PX64.5 57.47,6.33 ; PX64.5 56.34,7.45 ; 42.53,136.34 PX15.2 ; PX15.2 42.53,138.59 ; PX15.2 41.41,137.47 ; PX15.2 43.66,137.47 ; PX47.2 77.47,53.66 ; PX47.2 78.59,52.53 ; PX47.2 76.34,52.53 ; PX47.2 77.47,51.41 ; 97.45,146.34 PX10.3 ; PX10.3 97.45,148.59 ; PX10.3 96.33,147.47 ; PX10.3 98.58,147.47 ; PX56.2 58.59,32.53 ; PX56.2 57.47,33.66 ; PX56.2 56.34,32.53 ; PX56.2 57.47,31.41 ; 116.34,72.53 PX37.2 ; PX37.2 118.59,72.53 ; PX37.2 117.47,73.66 ; PX37.2 117.47,71.41 ; PX12.3 58.58,147.47 ; PX12.3 57.45,148.59 ; PX12.3 57.45,146.34 ; PX12.3 56.33,147.47 ; 41.42,17.45 PX59.4 ; PX59.4 42.55,18.58 ; PX59.4 43.67,17.45 ; PX59.4 42.55,16.33 ; PX57.3 163.67,22.53 ; PX57.3 162.55,23.66 ; PX57.3 161.42,22.53 ; PX57.3 162.55,21.41 ; 57.47,51.41 PX48.2 ; PX48.2 57.47,53.66 ; PX48.2 56.34,52.53 ; PX48.2 58.59,52.53 ; PX35.5 37.45,83.66 ; PX35.5 37.45,81.41 ; PX35.5 36.33,82.53 ; PX35.5 38.58,82.53 ; 16.33,82.53 PX36.5 ; PX36.5 18.58,82.53 ; PX36.5 17.45,83.66 ; PX36.5 17.45,81.41 ; 17.45,96.33 PX32.4 ; PX32.4 17.45,98.58 ; PX32.4 16.33,97.45 ; PX32.4 18.58,97.45 ; PX61.5 118.59,7.45 ; PX61.5 117.47,6.33 ; PX61.5 117.47,8.58 ; PX61.5 116.34,7.45 ; 101.41,167.47 PX2.2 ; PX2.2 102.53,168.59 ; PX2.2 103.66,167.47 ; PX2.2 102.53,166.34 ; 102.53,151.42 PX10.5 ; PX10.5 102.53,153.67 ; PX10.5 103.66,152.55 ; PX10.5 101.41,152.55 ; 42.53,81.41 PX35.2 ; PX35.2 43.66,82.53 ; PX35.2 41.41,82.53 ; PX35.2 42.53,83.66 ; PX17.2 123.66,127.47 ; PX17.2 122.53,128.59 ; PX17.2 122.53,126.34 ; PX17.2 121.41,127.47 ; 122.53,171.42 PX1.5 ; PX1.5 123.66,172.55 ; PX1.5 122.53,173.67 ; PX1.5 121.41,172.55 ; 97.45,166.34 PX2.3 ; PX2.3 96.33,167.47 ; PX2.3 97.45,168.59 ; PX2.3 98.58,167.47 ; PX5.4 157.45,163.67 ; PX5.4 156.33,162.55 ; PX5.4 157.45,161.42 ; PX5.4 158.58,162.55 ; 116.34,52.53 PX45.2 ; PX45.2 117.47,53.66 ; PX45.2 118.59,52.53 ; PX45.2 117.47,51.41 ; 101.42,32.53 PX54.3 ; PX54.3 102.55,33.66 ; PX54.3 103.67,32.53 ; PX54.3 102.55,31.41 ; 121.42,72.53 PX37.3 ; PX37.3 122.55,73.66 ; PX37.3 123.67,72.53 ; PX37.3 122.55,71.41 ; 82.55,53.66 PX47.3 82.55,51.41 ; 101.42,7.45 PX62.4 ; PX62.4 102.55,8.58 ; PX62.4 103.67,7.45 ; PX62.4 102.55,6.33 ; PX11.5 83.66,152.55 ; PX11.5 82.53,151.42 ; PX11.5 81.41,152.55 ; PX11.5 82.53,153.67 ; PX57.4 163.67,17.45 ; PX57.4 162.55,18.58 ; PX57.4 161.42,17.45 ; PX57.4 162.55,16.33 ; 122.55,26.33 PX53.4 ; PX53.4 122.55,28.58 ; PX53.4 121.42,27.45 ; PX53.4 123.67,27.45 ; PX14.3 138.58,137.47 ; PX14.3 136.33,137.47 ; PX14.3 137.45,138.59 ; PX14.3 137.45,136.34 ; 82.55,48.58 PX47.4 82.55,46.33 ; 161.42,82.55 PX33.4 ; PX33.4 163.67,82.55 ; PX33.4 162.55,83.67 ; PX33.4 162.55,81.42 ; 97.45,131.42 PX18.4 97.45,133.67 ; 77.45,166.34 PX3.3 ; PX3.3 76.33,167.47 ; PX3.3 77.45,168.59 ; PX3.3 78.58,167.47 ; 62.53,146.34 PX12.2 ; PX12.2 63.66,147.47 ; PX12.2 62.53,148.59 ; PX12.2 61.41,147.47 ; 23.7,111.2 RZ7.1 ; PX46.4 102.55,48.58 ; PX46.4 102.55,46.33 ; PX46.4 103.67,47.45 ; PX46.4 101.42,47.45 ; PX35.4 38.58,77.45 ; PX35.4 37.45,78.58 ; PX35.4 37.45,76.33 ; PX35.4 36.33,77.45 ; PX1.4 118.58,172.55 ; PX1.4 116.33,172.55 ; PX1.4 117.45,171.42 ; PX1.4 117.45,173.67 ; PX23.4 37.45,118.58 ; PX23.4 36.33,117.45 ; PX23.4 37.45,116.33 ; PX23.4 38.58,117.45 ; 16.33,157.47 PX8.3 ; PX8.3 17.45,158.59 ; PX8.3 18.58,157.47 ; PX8.3 17.45,156.34 ; PX24.4 17.45,118.58 ; PX24.4 18.58,117.45 ; PX24.4 17.45,116.33 ; PX24.4 16.33,117.45 ; PX44.5 18.58,62.53 ; PX44.5 17.45,63.66 ; PX44.5 16.33,62.53 ; PX44.5 17.45,61.41 ; 76.34,32.53 PX55.2 ; PX55.2 78.59,32.53 ; PX55.2 77.47,31.41 ; PX55.2 77.47,33.66 ; 148.8,23.7 RZ14.1 ; PX23.3 42.53,118.58 ; PX23.3 43.66,117.45 ; PX23.3 41.41,117.45 ; PX23.3 42.53,116.33 ; 78.59,72.53 PX39.2 77.47,71.41 ; J1.136 v1(66.83,85.33) ; PX3.4 78.58,172.55 ; PX3.4 77.45,171.42 ; PX3.4 76.33,172.55 ; PX3.4 77.45,173.67 ; PX40.5 58.59,67.45 ; PX40.5 57.47,66.33 ; PX40.5 57.47,68.58 ; 136.34,17.45 PX58.5 ; PX58.5 138.59,17.45 ; PX58.5 137.47,16.33 ; PX58.5 137.47,18.58 ; 23.7,71.2 RZ9.1 ; 156.34,17.45 PX57.5 ; PX57.5 158.59,17.45 ; PX57.5 157.47,18.58 ; PX57.5 157.47,16.33 ; PX21.3 157.47,123.67 ; PX21.3 157.47,121.42 ; PX21.3 158.59,122.55 ; PX21.3 156.34,122.55 ; J1.128 69.36,85.61 arc(69.36,85.57) 69.34,85.54 v1(69,85.2) ; PX43.5 37.45,63.66 ; PX43.5 36.33,62.53 ; PX43.5 37.45,61.41 ; PX43.5 38.58,62.53 ; 108.8,13.7 RZ16.1 ; 122.53,108.59 PX25.2 121.41,107.47 ; 81.41,107.47 PX27.2 ; PX27.2 82.53,106.34 ; PX27.2 83.66,107.47 ; PX27.2 82.53,108.59 ; PX32.2 22.53,103.66 ; PX32.2 21.41,102.53 ; PX32.2 22.53,101.41 ; PX32.2 23.66,102.53 ; 141.41,137.47 PX14.2 142.53,138.59 ; 156.3,108.8 RZ8.1 ; 31.2,156.3 RZ3.1 ; PX13.4 157.45,143.67 ; PX13.4 157.45,141.42 ; PX13.4 156.33,142.55 ; PX13.4 158.58,142.55 ; 71.2,126.3 RZ5.1 ; 37.45,138.59 PX15.3 38.58,137.47 ; 68.8,13.7 RZ15.1 ; 71.2,166.3 RZ1.1 ; 151.2,156.3 RZ4.1 ; 68.8,53.7 RZ11.1
  TOP w0.231: 110.65,90.23 J1.152 ; J1.152 115.7,89.77 ; J1.152 115.7,90 ; J1.152 110.65,89.77 ; J1.152 110.65,90 ; J1.152 115.7,90.23 ; J1.152 113.17,90.39 ; J1.152 113.17,89.61 ; 70.65,89.77 J1.160 ; J1.160 73.17,89.61 ; J1.160 70.65,90 ; J1.160 75.7,89.77 ; J1.160 75.7,90 ; J1.160 75.7,90.23 ; J1.160 73.17,90.39 ; J1.160 70.65,90.23 ; 106.83,90 109.35,90 ; 106.83,90 109.35,90.23 ; 106.83,90 106.83,89.61 ; 106.83,90 104.3,89.77 ; 106.83,90 104.3,90.23 ; 106.83,90 104.3,90 ; 106.83,90 109.35,89.77 ; 106.83,90 106.83,90.39 ; 60.36,90 J1.162 ; J1.162 63.51,89.76 ; J1.162 61.94,90.39 ; J1.162 63.51,90 ; J1.162 60.36,89.76 ; J1.162 63.51,90.24 ; J1.162 61.94,89.61 ; J1.162 60.36,90.24 ; 76.49,90 78.06,90 ; 78.06,90 76.49,90.24 ; 78.06,90 79.64,89.76 ; 78.06,90 76.49,89.76 ; 78.06,90 79.64,90 ; 78.06,90 78.06,89.61 ; 78.06,90 78.06,90.39 ; 78.06,90 79.64,90.24 ; J1.151 118.06,90.39 ; J1.151 119.64,89.76 ; J1.151 116.49,89.76 ; J1.151 118.06,89.61 ; J1.151 116.49,90 ; J1.151 119.64,90.24 ; J1.151 119.64,90 ; J1.151 116.49,90.24 ; J1.161 69.35,90.23 ; J1.161 66.83,90.39 ; J1.161 64.3,90.23 ; J1.161 64.3,89.77 ; J1.161 69.35,89.77 ; J1.161 69.35,90 ; J1.161 66.83,89.61 ; J1.161 64.3,90 ; 81.94,90 83.51,90 ; 81.94,90 80.36,90.24 ; 81.94,90 80.36,90 ; 81.94,90 81.94,89.61 ; 81.94,90 83.51,90.24 ; 81.94,90 81.94,90.39 ; 81.94,90 80.36,89.76 ; 81.94,90 83.51,89.76 ; 84.3,90.23 J1.157 ; J1.157 86.83,90.39 ; J1.157 89.35,90 ; J1.157 86.83,89.61 ; J1.157 84.3,89.77 ; J1.157 89.35,89.77 ; J1.157 89.35,90.23 ; J1.157 84.3,90 ; 100.36,89.76 J1.154 ; J1.154 103.51,90 ; J1.154 100.36,90 ; J1.154 103.51,90.24 ; J1.154 103.51,89.76 ; J1.154 101.94,90.39 ; J1.154 101.94,89.61 ; J1.154 100.36,90.24 ; 98.06,90 99.64,89.76 ; 98.06,90 96.49,90.24 ; 98.06,90 96.49,90 ; 98.06,90 96.49,89.76 ; 98.06,90 99.64,90.24 ; 98.06,90 98.06,90.39 ; 98.06,90 98.06,89.61 ; 98.06,90 99.64,90 ; J1.156 95.7,89.77 ; J1.156 95.7,90.23 ; J1.156 93.17,89.61 ; J1.156 90.65,89.77 ; J1.156 90.65,90 ; J1.156 90.65,90.23 ; J1.156 93.17,90.39 ; J1.156 95.7,90
  TOP w0.26: RZ4.2 v1(150.4,157.2) ; RZ9.4 v1(22.8,68.8) ; RZ15.3 v1(70.4,11.9) ; RZ7.4 v1(22.8,108.8) ; v1(108.8,11.9) 108.8,13.7 ; RZ2.4 v1(108.8,167.2) ; v1(111.2,168.1) 111.2,166.3 ; v1(151.2,158.1) 151.2,156.3 ; RZ13.3 v1(30.4,21.9) ; RZ3.4 v1(28.8,157.2) ; RZ8.2 v1(157.2,109.6) ; RZ10.3 v1(158.1,70.4) ; RZ16.2 v1(109.6,12.8) ; v1(31.2,158.1) 31.2,156.3 ; v1(111.2,128.1) 111.2,126.3 ; v1(108.8,51.9) 108.8,53.7 ; RZ3.2 v1(30.4,157.2) ; RZ15.2 v1(69.6,12.8) ; RZ16.3 v1(110.4,11.9) ; v1(21.9,111.2) 23.7,111.2 ; RZ13.4 v1(31.2,22.8) ; v1(158.1,68.8) 156.3,68.8 ; RZ5.4 v1(68.8,127.2) ; v1(28.8,21.9) 28.8,23.7 ; RZ9.3 v1(21.9,69.6) ; RZ10.4 v1(157.2,71.2) ; RZ12.3 v1(110.4,51.9) ; RZ13.2 v1(29.6,22.8) ; RZ2.3 v1(109.6,168.1) ; RZ11.2 v1(69.6,52.8) ; RZ8.4 v1(157.2,111.2) ; RZ7.3 v1(21.9,109.6) ; RZ5.3 v1(69.6,128.1) ; RZ3.3 v1(29.6,158.1) ; RZ11.3 v1(70.4,51.9) ; RZ9.2 v1(22.8,70.4) ; RZ7.2 v1(22.8,110.4) ; RZ14.4 v1(151.2,22.8) ; RZ14.2 v1(149.6,22.8) ; RZ4.3 v1(149.6,158.1) ; RZ1.2 v1(70.4,167.2) ; v1(68.8,11.9) 68.8,13.7 ; RZ8.3 v1(158.1,110.4) ; RZ6.3 v1(109.6,128.1) ; v1(158.1,108.8) 156.3,108.8 ; RZ11.4 v1(71.2,52.8) ; v1(71.2,128.1) 71.2,126.3 ; RZ1.4 v1(68.8,167.2) ; RZ1.3 v1(69.6,168.1) ; RZ6.4 v1(108.8,127.2) ; RZ5.2 v1(70.4,127.2) ; v1(68.8,51.9) 68.8,53.7 ; RZ10.2 v1(157.2,69.6) ; RZ12.4 v1(111.2,52.8) ; v1(21.9,71.2) 23.7,71.2 ; v1(71.2,168.1) 71.2,166.3 ; RZ6.2 v1(110.4,127.2) ; RZ16.4 v1(111.2,12.8) ; RZ2.2 v1(110.4,167.2) ; v1(148.8,21.9) 148.8,23.7 ; RZ4.4 v1(148.8,157.2) ; RZ12.2 v1(109.6,52.8) ; RZ14.3 v1(150.4,21.9) ; RZ15.4 v1(71.2,12.8)
  TOP w0.35: 106.83,87.15 v1(106.83,88.98) ; J1.73 v1(90.64,90.95) ; J1.124 v1(70.64,89.06) ; J1.53 v1(96.98,90.95) ; J1.108 v1(75.72,88.91) ; J1.56 v1(96.35,89.08) ; J1.145 v1(63.65,90.95) ; J1.21 v1(111.27,90.95) ; J1.146 v1(63.65,88.98) ; J1.49 v1(102.38,90.95) ; J1.13 v1(113.81,90.95) ; J1.80 v1(88.73,89.08) ; J1.16 v1(113.18,88.98) ; J1.61 v1(94.44,90.95) ; J1.20 v1(111.91,88.98) ; J1.64 v1(93.81,89.08) ; J1.60 v1(95.08,89.08) ; J1.125 v1(70,90.95) ; J1.88 v1(86.19,89.08) ; J1.132 v1(68.1,88.93) ; J1.44 v1(104.29,88.98) ; J1.140 v1(65.56,89.07) ; J1.101 v1(77.62,90.95) ; J1.48 v1(103.02,88.98) ; J1.17 v1(112.54,90.95) ; J1.65 v1(93.17,90.95) ; J1.105 v1(76.35,90.95) ; J1.89 v1(85.56,90.95) ; J1.81 v1(88.09,90.95) ; J1.5 v1(116.35,90.95) ; J1.72 v1(91.27,89.08) ; J1.85 v1(86.83,90.95) ; 76.98,87.15 v1(76.99,89.01) ; J1.116 v1(73.18,89.05) ; J1.133 v1(67.46,90.95) ; J1.96 v1(83.65,89.08) ; J1.37 v1(106.19,90.95) ; J1.137 v1(66.19,90.95) ; J1.141 v1(64.92,90.95) ; 91.91,92.85 v1(91.91,90.95) ; J1.120 v1(71.91,89.02) ; J1.4 v1(116.99,88.98) ; J1.100 v1(82.38,89.08) ; J1.52 v1(97.62,89.08) ; J1.93 v1(84.28,90.95) ; J1.25 v1(110,90.95) ; J1.109 v1(75.08,90.95) ; J1.12 v1(114.45,88.98) ; J1.113 v1(73.81,90.95) ; J1.121 v1(71.27,90.95) ; J1.68 v1(92.54,89.08) ; 74.44,87.15 v1(74.45,89.08) ; J1.40 v1(105.56,88.98) ; J1.97 v1(83.02,90.95) ; J1.57 v1(95.72,90.95) ; J1.33 v1(107.46,90.95) ; J1.29 v1(108.73,90.95) ; J1.92 v1(84.92,89.08) ; J1.45 v1(103.65,90.95) ; J1.41 v1(104.92,90.95) ; J1.117 v1(72.54,90.95) ; J1.9 v1(115.08,90.95) ; J1.84 v1(87.46,89.08) ; J1.76 v1(90,89.08) ; 109.36,87.15 v1(109.37,88.98) ; J1.24 v1(110.64,88.98) ; J1.1 v1(117.62,90.95) ; J1.8 v1(115.72,88.98) ; J1.32 v1(108.1,88.98) ; J1.129 v1(68.73,90.95) ; 89.36,92.85 v1(89.36,90.95)
  BOTTOM w0.226: PX35.2 43.66,82.53 ; PX35.2 42.53,81.41 ; PX35.2 42.53,83.66 ; PX35.2 41.41,82.53 ; PX46.4 103.67,47.45 ; PX46.4 102.55,48.58 ; PX46.4 101.42,47.45 ; PX46.4 102.55,46.33 ; PX7.2 43.66,157.47 ; PX7.2 41.41,157.47 ; PX7.2 42.53,156.34 ; PX7.2 42.53,158.59 ; 137.47,116.34 PX22.2 ; PX22.2 137.47,118.59 ; PX22.2 138.59,117.47 ; PX22.2 136.34,117.47 ; 16.33,62.53 PX44.5 ; PX44.5 17.45,61.41 ; PX44.5 18.58,62.53 ; PX44.5 17.45,63.66 ; 17.45,116.33 PX24.4 ; PX24.4 17.45,118.58 ; PX24.4 16.33,117.45 ; PX24.4 18.58,117.45 ; PX60.4 23.67,17.45 ; PX60.4 21.42,17.45 ; PX60.4 22.55,18.58 ; PX60.4 22.55,16.33 ; 122.55,26.33 PX53.4 ; PX53.4 123.67,27.45 ; PX53.4 121.42,27.45 ; PX53.4 122.55,28.58 ; 162.55,36.33 PX49.4 ; PX49.4 161.42,37.45 ; PX49.4 162.55,38.58 ; PX49.4 163.67,37.45 ; PX32.3 23.66,97.45 ; PX32.3 21.41,97.45 ; PX32.3 22.53,98.58 ; PX32.3 22.53,96.33 ; PX9.4 118.58,152.55 ; PX9.4 117.45,153.67 ; PX9.4 116.33,152.55 ; PX9.4 117.45,151.42 ; PX10.5 103.66,152.55 ; PX10.5 101.41,152.55 ; PX10.5 102.53,153.67 ; PX10.5 102.53,151.42 ; 82.55,26.33 PX55.4 ; PX55.4 81.42,27.45 ; PX55.4 82.55,28.58 ; PX55.4 83.67,27.45 ; PX56.5 58.59,27.45 ; PX56.5 57.47,28.58 ; PX56.5 56.34,27.45 ; PX56.5 57.47,26.33 ; PX2.5 103.66,172.55 ; PX2.5 102.53,171.42 ; PX2.5 101.41,172.55 ; PX2.5 102.53,173.67 ; 102.53,126.34 PX18.2 ; PX18.2 103.66,127.47 ; PX18.2 101.41,127.47 ; PX18.2 102.53,128.59 ; PX36.3 23.66,77.45 ; PX36.3 22.53,78.58 ; PX36.3 22.53,76.33 ; PX36.3 21.41,77.45 ; 77.47,46.33 PX47.5 ; PX47.5 78.59,47.45 ; PX47.5 77.47,48.58 ; PX47.5 76.34,47.45 ; 61.41,107.47 PX28.2 ; PX28.2 62.53,106.34 ; PX28.2 62.53,108.59 ; PX28.2 63.66,107.47 ; 57.45,171.42 PX4.4 ; PX4.4 57.45,173.67 ; PX4.4 56.33,172.55 ; PX4.4 58.58,172.55 ; PX30.2 137.47,98.59 ; PX30.2 136.34,97.47 ; PX30.2 138.59,97.47 ; PX30.2 137.47,96.34 ; 101.42,12.53 PX62.3 ; PX62.3 102.55,11.41 ; PX62.3 102.55,13.66 ; PX62.3 103.67,12.53 ; PX13.2 162.53,138.59 ; PX13.2 162.53,136.34 ; PX13.2 163.66,137.47 ; PX13.2 161.41,137.47 ; 81.41,127.47 PX19.2 ; PX19.2 82.53,128.59 ; PX19.2 83.66,127.47 ; PX19.2 82.53,126.34 ; PX21.2 157.47,118.59 ; PX21.2 157.47,116.34 ; PX21.2 156.34,117.47 ; PX21.2 158.59,117.47 ; PX12.5 62.53,153.67 ; PX12.5 63.66,152.55 ; PX12.5 62.53,151.42 ; PX12.5 61.41,152.55 ; 77.45,166.34 PX3.3 ; PX3.3 78.58,167.47 ; PX3.3 77.45,168.59 ; PX3.3 76.33,167.47 ; 117.45,131.42 PX17.4 ; PX17.4 116.33,132.55 ; PX17.4 117.45,133.67 ; PX17.4 118.58,132.55 ; PX55.3 82.55,33.66 ; PX55.3 81.42,32.53 ; PX55.3 82.55,31.41 ; PX55.3 83.67,32.53 ; PX53.2 117.47,33.66 ; PX53.2 118.59,32.53 ; PX53.2 117.47,31.41 ; PX53.2 116.34,32.53 ; 141.42,122.55 PX22.4 ; PX22.4 143.67,122.55 ; PX22.4 142.55,123.67 ; PX22.4 142.55,121.42 ; 76.33,172.55 PX3.4 ; PX3.4 77.45,171.42 ; PX3.4 77.45,173.67 ; PX3.4 78.58,172.55 ; 77.47,51.41 PX47.2 ; PX47.2 77.47,53.66 ; PX47.2 76.34,52.53 ; PX47.2 78.59,52.53 ; 37.45,101.41 PX31.5 ; PX31.5 38.58,102.53 ; PX31.5 37.45,103.66 ; PX31.5 36.33,102.53 ; PX40.4 63.67,67.45 ; PX40.4 61.42,67.45 ; PX40.4 62.55,68.58 ; PX40.4 62.55,66.33 ; 77.45,111.42 PX27.4 ; PX27.4 77.45,113.67 ; PX27.4 76.33,112.55 ; PX27.4 78.58,112.55 ; PX35.3 42.53,78.58 ; PX35.3 42.53,76.33 ; PX35.3 41.41,77.45 ; PX35.3 43.66,77.45 ; PX37.3 123.67,72.53 ; PX37.3 122.55,73.66 ; PX37.3 122.55,71.41 ; PX37.3 121.42,72.53 ; PX49.2 158.59,42.53 ; PX49.2 157.47,43.66 ; PX49.2 156.34,42.53 ; PX49.2 157.47,41.41 ; PX44.3 22.53,58.58 ; PX44.3 23.66,57.45 ; PX44.3 22.53,56.33 ; PX44.3 21.41,57.45 ; PX4.2 63.66,167.47 ; PX4.2 61.41,167.47 ; PX4.2 62.53,166.34 ; PX4.2 62.53,168.59 ; PX52.5 18.59,37.45 ; PX52.5 17.47,36.33 ; PX52.5 17.47,38.58 ; PX52.5 16.34,37.45 ; PX25.5 122.53,113.67 ; PX25.5 122.53,111.42 ; PX25.5 123.66,112.55 ; PX25.5 121.41,112.55 ; 137.45,141.42 PX14.4 ; PX14.4 136.33,142.55 ; PX14.4 138.58,142.55 ; PX14.4 137.45,143.67 ; PX56.3 62.55,33.66 ; PX56.3 61.42,32.53 ; PX56.3 63.67,32.53 ; PX56.3 62.55,31.41 ; PX43.5 38.58,62.53 ; PX43.5 36.33,62.53 ; PX43.5 37.45,63.66 ; PX43.5 37.45,61.41 ; 117.47,11.41 PX61.2 ; PX61.2 118.59,12.53 ; PX61.2 117.47,13.66 ; PX61.2 116.34,12.53 ; PX37.4 122.55,68.58 ; PX37.4 123.67,67.45 ; PX37.4 122.55,66.33 ; PX37.4 121.42,67.45 ; PX5.5 163.66,162.55 ; PX5.5 161.41,162.55 ; PX5.5 162.53,163.67 ; PX5.5 162.53,161.42 ; 117.47,51.41 PX45.2 ; PX45.2 116.34,52.53 ; PX45.2 118.59,52.53 ; PX45.2 117.47,53.66 ; 97.47,51.41 PX46.2 ; PX46.2 96.34,52.53 ; PX46.2 98.59,52.53 ; PX46.2 97.47,53.66 ; 36.33,157.47 PX7.3 ; PX7.3 38.58,157.47 ; PX7.3 37.45,158.59 ; PX7.3 37.45,156.34 ; 61.42,47.45 PX48.4 ; PX48.4 62.55,48.58 ; PX48.4 63.67,47.45 ; PX48.4 62.55,46.33 ; 156.34,22.53 PX57.2 ; PX57.2 157.47,21.41 ; PX57.2 158.59,22.53 ; PX57.2 157.47,23.66 ; PX54.4 103.67,27.45 ; PX54.4 102.55,28.58 ; PX54.4 102.55,26.33 ; PX54.4 101.42,27.45 ; 157.47,76.34 PX33.2 ; PX33.2 156.34,77.47 ; PX33.2 158.59,77.47 ; PX33.2 157.47,78.59 ; PX8.2 23.66,157.47 ; PX8.2 22.53,158.59 ; PX8.2 22.53,156.34 ; PX8.2 21.41,157.47 ; 62.55,51.41 PX48.3 ; PX48.3 63.67,52.53 ; PX48.3 62.55,53.66 ; PX48.3 61.42,52.53 ; PX31.3 43.66,97.45 ; PX31.3 41.41,97.45 ; PX31.3 42.53,96.33 ; PX31.3 42.53,98.58 ; 17.47,21.41 PX60.2 ; PX60.2 17.47,23.66 ; PX60.2 18.59,22.53 ; PX60.2 16.34,22.53 ; 21.41,162.55 PX8.5 ; PX8.5 22.53,163.67 ; PX8.5 23.66,162.55 ; PX8.5 22.53,161.42 ; 97.47,66.33 PX38.5 ; PX38.5 97.47,68.58 ; PX38.5 96.34,67.45 ; PX38.5 98.59,67.45 ; PX62.2 97.47,13.66 ; PX62.2 97.47,11.41 ; PX62.2 96.34,12.53 ; PX62.2 98.59,12.53 ; 121.42,32.53 PX53.3 ; PX53.3 123.67,32.53 ; PX53.3 122.55,31.41 ; PX53.3 122.55,33.66 ; 162.55,61.42 PX41.4 ; PX41.4 161.42,62.55 ; PX41.4 163.67,62.55 ; PX41.4 162.55,63.67 ; PX17.3 118.58,127.47 ; PX17.3 117.45,128.59 ; PX17.3 116.33,127.47 ; PX17.3 117.45,126.34 ; 137.47,41.41 PX50.2 ; PX50.2 138.59,42.53 ; PX50.2 137.47,43.66 ; PX50.2 136.34,42.53 ; 116.34,27.45 PX53.5 ; PX53.5 117.47,28.58 ; PX53.5 117.47,26.33 ; PX53.5 118.59,27.45 ; 137.45,156.34 PX6.3 ; PX6.3 136.33,157.47 ; PX6.3 137.45,158.59 ; PX6.3 138.58,157.47 ; 81.41,147.47 PX11.2 ; PX11.2 82.53,148.59 ; PX11.2 83.66,147.47 ; PX11.2 82.53,146.34 ; 41.41,162.55 PX7.5 ; PX7.5 42.53,161.42 ; PX7.5 42.53,163.67 ; PX7.5 43.66,162.55 ; 21.42,42.53 PX52.3 ; PX52.3 22.55,43.66 ; PX52.3 23.67,42.53 ; PX52.3 22.55,41.41 ; 17.45,156.34 PX8.3 ; PX8.3 18.58,157.47 ; PX8.3 17.45,158.59 ; PX8.3 16.33,157.47 ; 37.47,41.41 PX51.2 ; PX51.2 36.34,42.53 ; PX51.2 38.59,42.53 ; PX51.2 37.47,43.66 ; 21.41,82.53 PX36.2 ; PX36.2 23.66,82.53 ; PX36.2 22.53,81.41 ; PX36.2 22.53,83.66 ; 102.53,111.42 PX26.5 ; PX26.5 102.53,113.67 ; PX26.5 103.66,112.55 ; PX26.5 101.41,112.55 ; 157.47,96.34 PX29.2 ; PX29.2 157.47,98.59 ; PX29.2 158.59,97.47 ; PX29.2 156.34,97.47 ; 37.45,121.41 PX23.5 ; PX23.5 38.58,122.53 ; PX23.5 37.45,123.66 ; PX23.5 36.33,122.53 ; PX34.3 137.47,83.67 ; PX34.3 137.47,81.42 ; PX34.3 136.34,82.55 ; PX34.3 138.59,82.55 ; PX62.4 103.67,7.45 ; PX62.4 102.55,8.58 ; PX62.4 102.55,6.33 ; PX62.4 101.42,7.45 ; 96.34,72.53 PX38.2 ; PX38.2 97.47,71.41 ; PX38.2 98.59,72.53 ; PX38.2 97.47,73.66 ; PX33.3 157.47,83.67 ; PX33.3 156.34,82.55 ; PX33.3 158.59,82.55 ; PX33.3 157.47,81.42 ; 81.42,67.45 PX39.4 ; PX39.4 83.67,67.45 ; PX39.4 82.55,68.58 ; PX39.4 82.55,66.33 ; PX61.5 117.47,8.58 ; PX61.5 118.59,7.45 ; PX61.5 116.34,7.45 ; PX61.5 117.47,6.33 ; PX59.2 38.59,22.53 ; PX59.2 37.47,21.41 ; PX59.2 36.34,22.53 ; PX59.2 37.47,23.66 ; PX45.5 117.47,48.58 ; PX45.5 117.47,46.33 ; PX45.5 116.34,47.45 ; PX45.5 118.59,47.45 ; 42.53,61.41 PX43.2 ; PX43.2 41.41,62.53 ; PX43.2 43.66,62.53 ; PX43.2 42.53,63.66 ; 61.41,127.47 PX20.2 ; PX20.2 63.66,127.47 ; PX20.2 62.53,126.34 ; PX20.2 62.53,128.59 ; 82.53,171.42 PX3.5 ; PX3.5 81.41,172.55 ; PX3.5 83.66,172.55 ; PX3.5 82.53,173.67 ; PX38.3 102.55,73.66 ; PX38.3 101.42,72.53 ; PX38.3 102.55,71.41 ; PX38.3 103.67,72.53 ; PX55.2 77.47,33.66 ; PX55.2 77.47,31.41 ; PX55.2 78.59,32.53 ; PX55.2 76.34,32.53 ; 122.53,151.42 PX9.5 ; PX9.5 123.66,152.55 ; PX9.5 122.53,153.67 ; PX9.5 121.41,152.55 ; PX27.2 82.53,108.59 ; PX27.2 81.41,107.47 ; PX27.2 82.53,106.34 ; PX27.2 83.66,107.47 ; 77.47,66.33 PX39.5 ; PX39.5 77.47,68.58 ; PX39.5 78.59,67.45 ; PX39.5 76.34,67.45 ; 117.47,66.33 PX37.5 ; PX37.5 116.34,67.45 ; PX37.5 118.59,67.45 ; PX37.5 117.47,68.58 ; PX1.5 123.66,172.55 ; PX1.5 121.41,172.55 ; PX1.5 122.53,171.42 ; PX1.5 122.53,173.67 ; PX26.3 98.58,107.47 ; PX26.3 97.45,108.59 ; PX26.3 96.33,107.47 ; PX26.3 97.45,106.34 ; 16.33,77.45 PX36.4 ; PX36.4 17.45,76.33 ; PX36.4 17.45,78.58 ; PX36.4 18.58,77.45 ; PX36.5 18.58,82.53 ; PX36.5 17.45,81.41 ; PX36.5 17.45,83.66 ; PX36.5 16.33,82.53 ; PX1.4 118.58,172.55 ; PX1.4 116.33,172.55 ; PX1.4 117.45,173.67 ; PX1.4 117.45,171.42 ; 141.41,157.47 PX6.2 ; PX6.2 142.53,158.59 ; PX6.2 143.66,157.47 ; PX6.2 142.53,156.34 ; 137.47,101.42 PX30.3 ; PX30.3 136.34,102.55 ; PX30.3 138.59,102.55 ; PX30.3 137.47,103.67 ; PX28.3 58.58,107.47 ; PX28.3 57.45,108.59 ; PX28.3 57.45,106.34 ; PX28.3 56.33,107.47 ; 141.42,97.47 PX30.5 ; PX30.5 143.67,97.47 ; PX30.5 142.55,98.59 ; PX30.5 142.55,96.34 ; 96.33,112.55 PX26.4 ; PX26.4 97.45,113.67 ; PX26.4 97.45,111.42 ; PX26.4 98.58,112.55 ; 37.45,96.33 PX31.4 ; PX31.4 36.33,97.45 ; PX31.4 38.58,97.45 ; PX31.4 37.45,98.58 ; 81.42,12.53 PX63.3 ; PX63.3 82.55,13.66 ; PX63.3 82.55,11.41 ; PX63.3 83.67,12.53 ; PX34.2 137.47,78.59 ; PX34.2 136.34,77.47 ; PX34.2 137.47,76.34 ; PX34.2 138.59,77.47 ; PX56.4 63.67,27.45 ; PX56.4 62.55,26.33 ; PX56.4 61.42,27.45 ; PX56.4 62.55,28.58 ; PX29.5 163.67,97.47 ; PX29.5 161.42,97.47 ; PX29.5 162.55,98.59 ; PX29.5 162.55,96.34 ; PX34.5 143.67,77.47 ; PX34.5 142.55,76.34 ; PX34.5 142.55,78.59 ; PX34.5 141.42,77.47 ; 156.34,122.55 PX21.3 ; PX21.3 157.47,121.42 ; PX21.3 157.47,123.67 ; PX21.3 158.59,122.55 ; PX10.3 97.45,148.59 ; PX10.3 97.45,146.34 ; PX10.3 96.33,147.47 ; PX10.3 98.58,147.47 ; PX29.3 158.59,102.55 ; PX29.3 157.47,101.42 ; PX29.3 156.34,102.55 ; PX29.3 157.47,103.67 ; PX64.3 62.55,13.66 ; PX64.3 61.42,12.53 ; PX64.3 63.67,12.53 ; PX64.3 62.55,11.41 ; PX14.2 142.53,138.59 ; PX14.2 142.53,136.34 ; PX14.2 141.41,137.47 ; PX14.2 143.66,137.47 ; 62.55,6.33 PX64.4 ; PX64.4 62.55,8.58 ; PX64.4 63.67,7.45 ; PX64.4 61.42,7.45 ; 82.55,46.33 PX47.4 ; PX47.4 83.67,47.45 ; PX47.4 82.55,48.58 ; PX47.4 81.42,47.45 ; PX9.3 117.45,148.59 ; PX9.3 117.45,146.34 ; PX9.3 116.33,147.47 ; PX9.3 118.58,147.47 ; 56.34,12.53 PX64.2 ; PX64.2 57.47,13.66 ; PX64.2 58.59,12.53 ; PX64.2 57.47,11.41 ; PX44.4 18.58,57.45 ; PX44.4 17.45,58.58 ; PX44.4 17.45,56.33 ; PX44.4 16.33,57.45 ; PX9.2 123.66,147.47 ; PX9.2 121.41,147.47 ; PX9.2 122.53,148.59 ; PX9.2 122.53,146.34 ; 81.42,7.45 PX63.4 ; PX63.4 83.67,7.45 ; PX63.4 82.55,6.33 ; PX63.4 82.55,8.58 ; PX49.3 162.55,43.66 ; PX49.3 162.55,41.41 ; PX49.3 163.67,42.53 ; PX49.3 161.42,42.53 ; 76.33,152.55 PX11.4 ; PX11.4 77.45,153.67 ; PX11.4 78.58,152.55 ; PX11.4 77.45,151.42 ; PX58.3 143.67,22.53 ; PX58.3 141.42,22.53 ; PX58.3 142.55,23.66 ; PX58.3 142.55,21.41 ; PX61.3 123.67,12.53 ; PX61.3 122.55,11.41 ; PX61.3 121.42,12.53 ; PX61.3 122.55,13.66 ; PX50.5 137.47,38.58 ; PX50.5 137.47,36.33 ; PX50.5 138.59,37.45 ; PX50.5 136.34,37.45 ; PX16.5 23.66,142.55 ; PX16.5 22.53,141.42 ; PX16.5 21.41,142.55 ; PX16.5 22.53,143.67 ; PX16.4 18.58,142.55 ; PX16.4 17.45,141.42 ; PX16.4 17.45,143.67 ; PX16.4 16.33,142.55 ; PX52.2 17.47,43.66 ; PX52.2 16.34,42.53 ; PX52.2 17.47,41.41 ; PX52.2 18.59,42.53 ; 121.42,7.45 PX61.4 ; PX61.4 122.55,6.33 ; PX61.4 122.55,8.58 ; PX61.4 123.67,7.45 ; 76.34,12.53 PX63.2 ; PX63.2 78.59,12.53 ; PX63.2 77.47,13.66 ; PX63.2 77.47,11.41 ; PX18.4 97.45,133.67 ; PX18.4 98.58,132.55 ; PX18.4 96.33,132.55 ; PX18.4 97.45,131.42 ; PX17.2 122.53,128.59 ; PX17.2 121.41,127.47 ; PX17.2 123.66,127.47 ; PX17.2 122.53,126.34 ; 116.34,72.53 PX37.2 ; PX37.2 118.59,72.53 ; PX37.2 117.47,73.66 ; PX37.2 117.47,71.41 ; 97.47,46.33 PX46.5 ; PX46.5 96.34,47.45 ; PX46.5 97.47,48.58 ; PX46.5 98.59,47.45 ; PX60.3 22.55,23.66 ; PX60.3 23.67,22.53 ; PX60.3 21.42,22.53 ; PX60.3 22.55,21.41 ; PX15.3 37.45,138.59 ; PX15.3 38.58,137.47 ; PX15.3 36.33,137.47 ; PX15.3 37.45,136.34 ; PX2.2 103.66,167.47 ; PX2.2 102.53,166.34 ; PX2.2 101.41,167.47 ; PX2.2 102.53,168.59 ; 21.41,117.45 PX24.3 ; PX24.3 22.53,116.33 ; PX24.3 23.66,117.45 ; PX24.3 22.53,118.58 ; PX21.5 162.55,118.59 ; PX21.5 162.55,116.34 ; PX21.5 161.42,117.47 ; PX21.5 163.67,117.47 ; 136.33,162.55 PX6.4 ; PX6.4 138.58,162.55 ; PX6.4 137.45,163.67 ; PX6.4 137.45,161.42 ; 36.33,77.45 PX35.4 ; PX35.4 38.58,77.45 ; PX35.4 37.45,76.33 ; PX35.4 37.45,78.58 ; 22.53,61.41 PX44.2 ; PX44.2 21.41,62.53 ; PX44.2 23.66,62.53 ; PX44.2 22.53,63.66 ; 102.55,51.41 PX46.3 ; PX46.3 102.55,53.66 ; PX46.3 103.67,52.53 ; PX46.3 101.42,52.53 ; PX13.5 162.53,143.67 ; PX13.5 161.41,142.55 ; PX13.5 162.53,141.42 ; PX13.5 163.66,142.55 ; 76.33,147.47 PX11.3 ; PX11.3 77.45,146.34 ; PX11.3 77.45,148.59 ; PX11.3 78.58,147.47 ; PX56.2 58.59,32.53 ; PX56.2 57.47,31.41 ; PX56.2 57.47,33.66 ; PX56.2 56.34,32.53 ; PX58.4 143.67,17.45 ; PX58.4 142.55,18.58 ; PX58.4 141.42,17.45 ; PX58.4 142.55,16.33 ; PX54.3 102.55,33.66 ; PX54.3 101.42,32.53 ; PX54.3 102.55,31.41 ; PX54.3 103.67,32.53 ; PX19.4 78.58,132.55 ; PX19.4 77.45,133.67 ; PX19.4 76.33,132.55 ; PX19.4 77.45,131.42 ; 161.42,82.55 PX33.4 ; PX33.4 163.67,82.55 ; PX33.4 162.55,81.42 ; PX33.4 162.55,83.67 ; PX8.4 17.45,163.67 ; PX8.4 18.58,162.55 ; PX8.4 16.33,162.55 ; PX8.4 17.45,161.42 ; 97.47,26.33 PX54.5 ; PX54.5 96.34,27.45 ; PX54.5 98.59,27.45 ; PX54.5 97.47,28.58 ; 142.53,161.42 PX6.5 ; PX6.5 142.53,163.67 ; PX6.5 143.66,162.55 ; PX6.5 141.41,162.55 ; PX22.3 138.59,122.55 ; PX22.3 137.47,123.67 ; PX22.3 137.47,121.42 ; PX22.3 136.34,122.55 ; PX24.2 23.66,122.53 ; PX24.2 22.53,123.66 ; PX24.2 22.53,121.41 ; PX24.2 21.41,122.53 ; PX28.5 62.53,113.67 ; PX28.5 63.66,112.55 ; PX28.5 61.41,112.55 ; PX28.5 62.53,111.42 ; 156.33,162.55 PX5.4 ; PX5.4 157.45,163.67 ; PX5.4 157.45,161.42 ; PX5.4 158.58,162.55 ; PX48.2 58.59,52.53 ; PX48.2 57.47,51.41 ; PX48.2 56.34,52.53 ; PX48.2 57.47,53.66 ; 61.41,132.55 PX20.5 ; PX20.5 63.66,132.55 ; PX20.5 62.53,133.67 ; PX20.5 62.53,131.42 ; 156.34,57.47 PX41.2 ; PX41.2 158.59,57.47 ; PX41.2 157.47,56.34 ; PX41.2 157.47,58.59 ; PX48.5 58.59,47.45 ; PX48.5 57.47,48.58 ; PX48.5 57.47,46.33 ; PX48.5 56.34,47.45 ; 41.41,122.53 PX23.2 ; PX23.2 43.66,122.53 ; PX23.2 42.53,121.41 ; PX23.2 42.53,123.66 ; PX22.5 142.55,118.59 ; PX22.5 143.67,117.47 ; PX22.5 141.42,117.47 ; PX22.5 142.55,116.34 ; PX57.5 158.59,17.45 ; PX57.5 156.34,17.45 ; PX57.5 157.47,16.33 ; PX57.5 157.47,18.58 ; PX16.3 18.58,137.47 ; PX16.3 17.45,136.34 ; PX16.3 16.33,137.47 ; PX16.3 17.45,138.59 ; 76.34,27.45 PX55.5 ; PX55.5 78.59,27.45 ; PX55.5 77.47,28.58 ; PX55.5 77.47,26.33 ; PX57.3 162.55,23.66 ; PX57.3 163.67,22.53 ; PX57.3 162.55,21.41 ; PX57.3 161.42,22.53 ; PX17.5 123.66,132.55 ; PX17.5 121.41,132.55 ; PX17.5 122.53,131.42 ; PX17.5 122.53,133.67 ; 37.45,161.42 PX7.4 ; PX7.4 36.33,162.55 ; PX7.4 37.45,163.67 ; PX7.4 38.58,162.55 ; 81.42,72.53 PX39.3 ; PX39.3 83.67,72.53 ; PX39.3 82.55,71.41 ; PX39.3 82.55,73.66 ; PX34.4 142.55,83.67 ; PX34.4 142.55,81.42 ; PX34.4 143.67,82.55 ; PX34.4 141.42,82.55 ; PX39.2 77.47,73.66 ; PX39.2 76.34,72.53 ; PX39.2 77.47,71.41 ; PX39.2 78.59,72.53 ; 116.33,167.47 PX1.3 ; PX1.3 117.45,166.34 ; PX1.3 117.45,168.59 ; PX1.3 118.58,167.47 ; 17.47,16.33 PX60.5 ; PX60.5 16.34,17.45 ; PX60.5 18.59,17.45 ; PX60.5 17.47,18.58 ; PX42.2 137.47,58.59 ; PX42.2 136.34,57.47 ; PX42.2 138.59,57.47 ; PX42.2 137.47,56.34 ; 142.55,56.34 PX42.5 ; PX42.5 143.67,57.47 ; PX42.5 141.42,57.47 ; PX42.5 142.55,58.59 ; 97.45,126.34 PX18.3 ; PX18.3 96.33,127.47 ; PX18.3 98.58,127.47 ; PX18.3 97.45,128.59 ; PX29.4 163.67,102.55 ; PX29.4 161.42,102.55 ; PX29.4 162.55,101.42 ; PX29.4 162.55,103.67 ; 137.45,136.34 PX14.3 ; PX14.3 137.45,138.59 ; PX14.3 136.33,137.47 ; PX14.3 138.58,137.47 ; 16.33,102.53 PX32.5 ; PX32.5 17.45,103.66 ; PX32.5 18.58,102.53 ; PX32.5 17.45,101.41 ; 136.34,62.55 PX42.3 ; PX42.3 138.59,62.55 ; PX42.3 137.47,61.42 ; PX42.3 137.47,63.67 ; PX15.4 38.58,142.55 ; PX15.4 37.45,141.42 ; PX15.4 37.45,143.67 ; PX15.4 36.33,142.55 ; 157.45,141.42 PX13.4 ; PX13.4 158.58,142.55 ; PX13.4 157.45,143.67 ; PX13.4 156.33,142.55 ; 102.55,66.33 PX38.4 ; PX38.4 103.67,67.45 ; PX38.4 101.42,67.45 ; PX38.4 102.55,68.58 ; 122.55,46.33 PX45.4 ; PX45.4 121.42,47.45 ; PX45.4 122.55,48.58 ; PX45.4 123.67,47.45 ; 121.41,167.47 PX1.2 ; PX1.2 123.66,167.47 ; PX1.2 122.53,166.34 ; PX1.2 122.53,168.59 ; PX25.3 117.45,108.59 ; PX25.3 118.58,107.47 ; PX25.3 116.33,107.47 ; PX25.3 117.45,106.34 ; 56.33,167.47 PX4.3 ; PX4.3 57.45,168.59 ; PX4.3 57.45,166.34 ; PX4.3 58.58,167.47 ; 81.41,132.55 PX19.5 ; PX19.5 83.66,132.55 ; PX19.5 82.53,133.67 ; PX19.5 82.53,131.42 ; 102.53,131.42 PX18.5 ; PX18.5 103.66,132.55 ; PX18.5 102.53,133.67 ; PX18.5 101.41,132.55 ; PX51.4 42.55,38.58 ; PX51.4 42.55,36.33 ; PX51.4 41.42,37.45 ; PX51.4 43.67,37.45 ; 156.34,62.55 PX41.3 ; PX41.3 157.47,61.42 ; PX41.3 158.59,62.55 ; PX41.3 157.47,63.67 ; 16.33,97.45 PX32.4 ; PX32.4 18.58,97.45 ; PX32.4 17.45,98.58 ; PX32.4 17.45,96.33 ; 82.55,51.41 PX47.3 ; PX47.3 82.55,53.66 ; PX47.3 81.42,52.53 ; PX47.3 83.67,52.53 ; PX52.4 22.55,38.58 ; PX52.4 21.42,37.45 ; PX52.4 22.55,36.33 ; PX52.4 23.67,37.45 ; PX41.5 163.67,57.47 ; PX41.5 162.55,56.34 ; PX41.5 161.42,57.47 ; PX41.5 162.55,58.59 ; 96.34,32.53 PX54.2 ; PX54.2 98.59,32.53 ; PX54.2 97.47,31.41 ; PX54.2 97.47,33.66 ; 56.34,67.45 PX40.5 ; PX40.5 57.47,68.58 ; PX40.5 58.59,67.45 ; PX40.5 57.47,66.33 ; PX3.2 83.66,167.47 ; PX3.2 82.53,166.34 ; PX3.2 82.53,168.59 ; PX3.2 81.41,167.47 ; 102.53,146.34 PX10.2 ; PX10.2 103.66,147.47 ; PX10.2 102.53,148.59 ; PX10.2 101.41,147.47 ; 96.33,167.47 PX2.3 ; PX2.3 98.58,167.47 ; PX2.3 97.45,168.59 ; PX2.3 97.45,166.34 ; 161.42,77.47 PX33.5 ; PX33.5 163.67,77.47 ; PX33.5 162.55,76.34 ; PX33.5 162.55,78.59 ; PX23.3 42.53,118.58 ; PX23.3 43.66,117.45 ; PX23.3 41.41,117.45 ; PX23.3 42.53,116.33 ; 142.55,101.42 PX30.4 ; PX30.4 141.42,102.55 ; PX30.4 143.67,102.55 ; PX30.4 142.55,103.67 ; 36.33,117.45 PX23.4 ; PX23.4 37.45,118.58 ; PX23.4 37.45,116.33 ; PX23.4 38.58,117.45 ; 36.33,57.45 PX43.4 ; PX43.4 37.45,56.33 ; PX43.4 37.45,58.58 ; PX43.4 38.58,57.45 ; 142.55,41.41 PX50.3 ; PX50.3 141.42,42.53 ; PX50.3 143.67,42.53 ; PX50.3 142.55,43.66 ; PX24.5 17.45,123.66 ; PX24.5 16.33,122.53 ; PX24.5 17.45,121.41 ; PX24.5 18.58,122.53 ; PX58.2 138.59,22.53 ; PX58.2 137.47,23.66 ; PX58.2 137.47,21.41 ; PX58.2 136.34,22.53 ; 41.42,17.45 PX59.4 ; PX59.4 43.67,17.45 ; PX59.4 42.55,18.58 ; PX59.4 42.55,16.33 ; PX10.4 98.58,152.55 ; PX10.4 97.45,153.67 ; PX10.4 96.33,152.55 ; PX10.4 97.45,151.42 ; 96.34,7.45 PX62.5 ; PX62.5 98.59,7.45 ; PX62.5 97.47,6.33 ; PX62.5 97.47,8.58 ; 82.53,111.42 PX27.5 ; PX27.5 83.66,112.55 ; PX27.5 81.41,112.55 ; PX27.5 82.53,113.67 ; 42.53,56.33 PX43.3 ; PX43.3 43.66,57.45 ; PX43.3 41.41,57.45 ; PX43.3 42.53,58.58 ; 57.45,111.42 PX28.4 ; PX28.4 56.33,112.55 ; PX28.4 57.45,113.67 ; PX28.4 58.58,112.55 ; 41.41,137.47 PX15.2 ; PX15.2 43.66,137.47 ; PX15.2 42.53,138.59 ; PX15.2 42.53,136.34 ; 21.41,102.53 PX32.2 ; PX32.2 22.53,103.66 ; PX32.2 22.53,101.41 ; PX32.2 23.66,102.53 ; PX20.4 58.58,132.55 ; PX20.4 57.45,133.67 ; PX20.4 56.33,132.55 ; PX20.4 57.45,131.42 ; PX15.5 43.66,142.55 ; PX15.5 42.53,143.67 ; PX15.5 41.41,142.55 ; PX15.5 42.53,141.42 ; PX50.4 143.67,37.45 ; PX50.4 142.55,36.33 ; PX50.4 142.55,38.58 ; PX50.4 141.42,37.45 ; PX12.4 57.45,153.67 ; PX12.4 56.33,152.55 ; PX12.4 58.58,152.55 ; PX12.4 57.45,151.42 ; 76.34,7.45 PX63.5 ; PX63.5 77.47,8.58 ; PX63.5 78.59,7.45 ; PX63.5 77.47,6.33 ; PX16.2 22.53,138.59 ; PX16.2 23.66,137.47 ; PX16.2 22.53,136.34 ; PX16.2 21.41,137.47 ; 161.42,17.45 PX57.4 ; PX57.4 163.67,17.45 ; PX57.4 162.55,16.33 ; PX57.4 162.55,18.58 ; 141.41,142.55 PX14.5 ; PX14.5 142.53,141.42 ; PX14.5 142.53,143.67 ; PX14.5 143.66,142.55 ; 61.42,72.53 PX40.3 ; PX40.3 63.67,72.53 ; PX40.3 62.55,71.41 ; PX40.3 62.55,73.66 ; 121.41,107.47 PX25.2 ; PX25.2 122.53,108.59 ; PX25.2 123.66,107.47 ; PX25.2 122.53,106.34 ; PX59.3 43.67,22.53 ; PX59.3 41.42,22.53 ; PX59.3 42.55,23.66 ; PX59.3 42.55,21.41 ; 42.53,101.41 PX31.2 ; PX31.2 41.41,102.53 ; PX31.2 42.53,103.66 ; PX31.2 43.66,102.53 ; 142.55,61.42 PX42.4 ; PX42.4 143.67,62.55 ; PX42.4 141.42,62.55 ; PX42.4 142.55,63.67 ; PX2.4 98.58,172.55 ; PX2.4 97.45,173.67 ; PX2.4 97.45,171.42 ; PX2.4 96.33,172.55 ; PX25.4 117.45,113.67 ; PX25.4 116.33,112.55 ; PX25.4 117.45,111.42 ; PX25.4 118.58,112.55 ; 162.55,121.42 PX21.4 ; PX21.4 161.42,122.55 ; PX21.4 162.55,123.67 ; PX21.4 163.67,122.55 ; 77.45,126.34 PX19.3 ; PX19.3 76.33,127.47 ; PX19.3 78.58,127.47 ; PX19.3 77.45,128.59 ; PX59.5 37.47,18.58 ; PX59.5 37.47,16.33 ; PX59.5 38.59,17.45 ; PX59.5 36.34,17.45 ; PX11.5 83.66,152.55 ; PX11.5 81.41,152.55 ; PX11.5 82.53,153.67 ; PX11.5 82.53,151.42 ; 156.33,137.47 PX13.3 ; PX13.3 157.45,136.34 ; PX13.3 157.45,138.59 ; PX13.3 158.58,137.47 ; PX45.3 122.55,53.66 ; PX45.3 122.55,51.41 ; PX45.3 123.67,52.53 ; PX45.3 121.42,52.53 ; PX4.5 63.66,172.55 ; PX4.5 61.41,172.55 ; PX4.5 62.53,171.42 ; PX4.5 62.53,173.67 ; 62.53,146.34 PX12.2 ; PX12.2 63.66,147.47 ; PX12.2 61.41,147.47 ; PX12.2 62.53,148.59 ; 36.34,37.45 PX51.5 ; PX51.5 37.47,38.58 ; PX51.5 38.59,37.45 ; PX51.5 37.47,36.33 ; PX20.3 58.58,127.47 ; PX20.3 57.45,126.34 ; PX20.3 56.33,127.47 ; PX20.3 57.45,128.59 ; PX12.3 58.58,147.47 ; PX12.3 57.45,146.34 ; PX12.3 57.45,148.59 ; PX12.3 56.33,147.47 ; PX40.2 58.59,72.53 ; PX40.2 57.47,73.66 ; PX40.2 57.47,71.41 ; PX40.2 56.34,72.53 ; PX27.3 77.45,108.59 ; PX27.3 77.45,106.34 ; PX27.3 78.58,107.47 ; PX27.3 76.33,107.47 ; PX5.3 158.58,157.47 ; PX5.3 156.33,157.47 ; PX5.3 157.45,158.59 ; PX5.3 157.45,156.34 ; PX26.2 102.53,108.59 ; PX26.2 102.53,106.34 ; PX26.2 101.41,107.47 ; PX26.2 103.66,107.47 ; PX51.3 43.67,42.53 ; PX51.3 41.42,42.53 ; PX51.3 42.55,43.66 ; PX51.3 42.55,41.41 ; PX35.5 37.45,83.66 ; PX35.5 38.58,82.53 ; PX35.5 36.33,82.53 ; PX35.5 37.45,81.41 ; PX5.2 162.53,158.59 ; PX5.2 162.53,156.34 ; PX5.2 163.66,157.47 ; PX5.2 161.41,157.47 ; 156.34,37.45 PX49.5 ; PX49.5 157.47,38.58 ; PX49.5 158.59,37.45 ; PX49.5 157.47,36.33 ; PX64.5 57.47,8.58 ; PX64.5 58.59,7.45 ; PX64.5 56.34,7.45 ; PX64.5 57.47,6.33 ; PX58.5 137.47,18.58 ; PX58.5 137.47,16.33 ; PX58.5 138.59,17.45 ; PX58.5 136.34,17.45
  vias: v1(61.74,90.95) v1(61.74,89.05) v1(99.84,90.95) v1(99.84,89.05) v1(118.89,91.15) v1(118.89,88.85)
